# EAGLE board BigEasyDriver-Panel-v14 (EAGLE 6.4), part 1 of 2
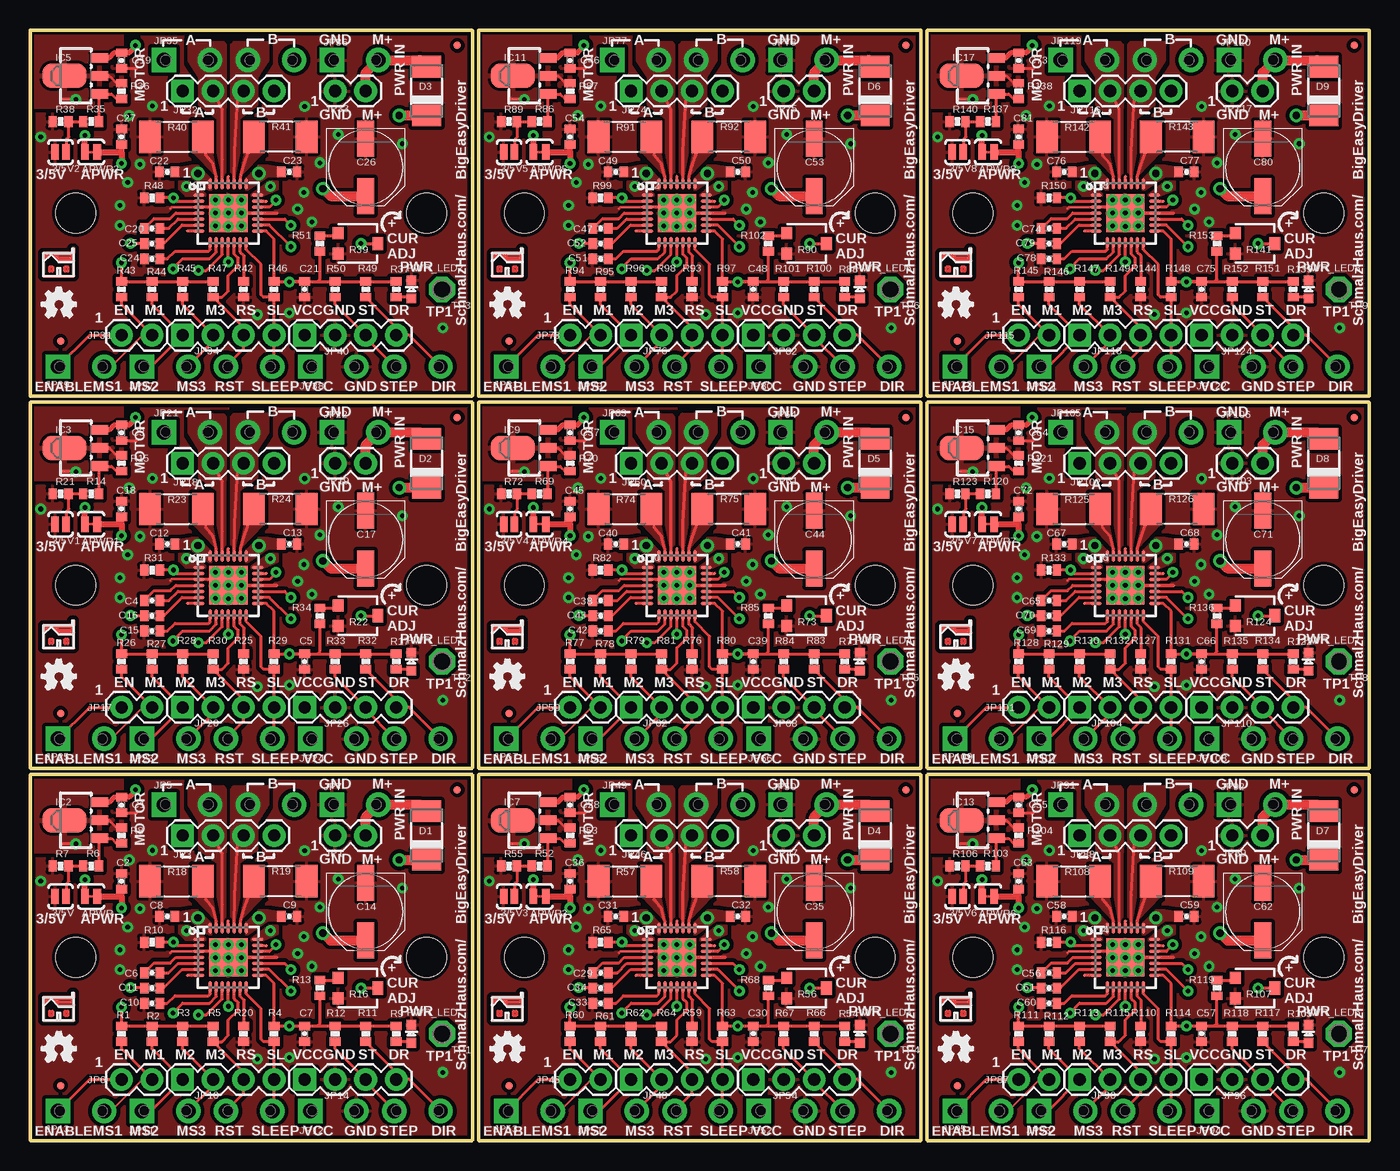
[diagram p0: board, top side]
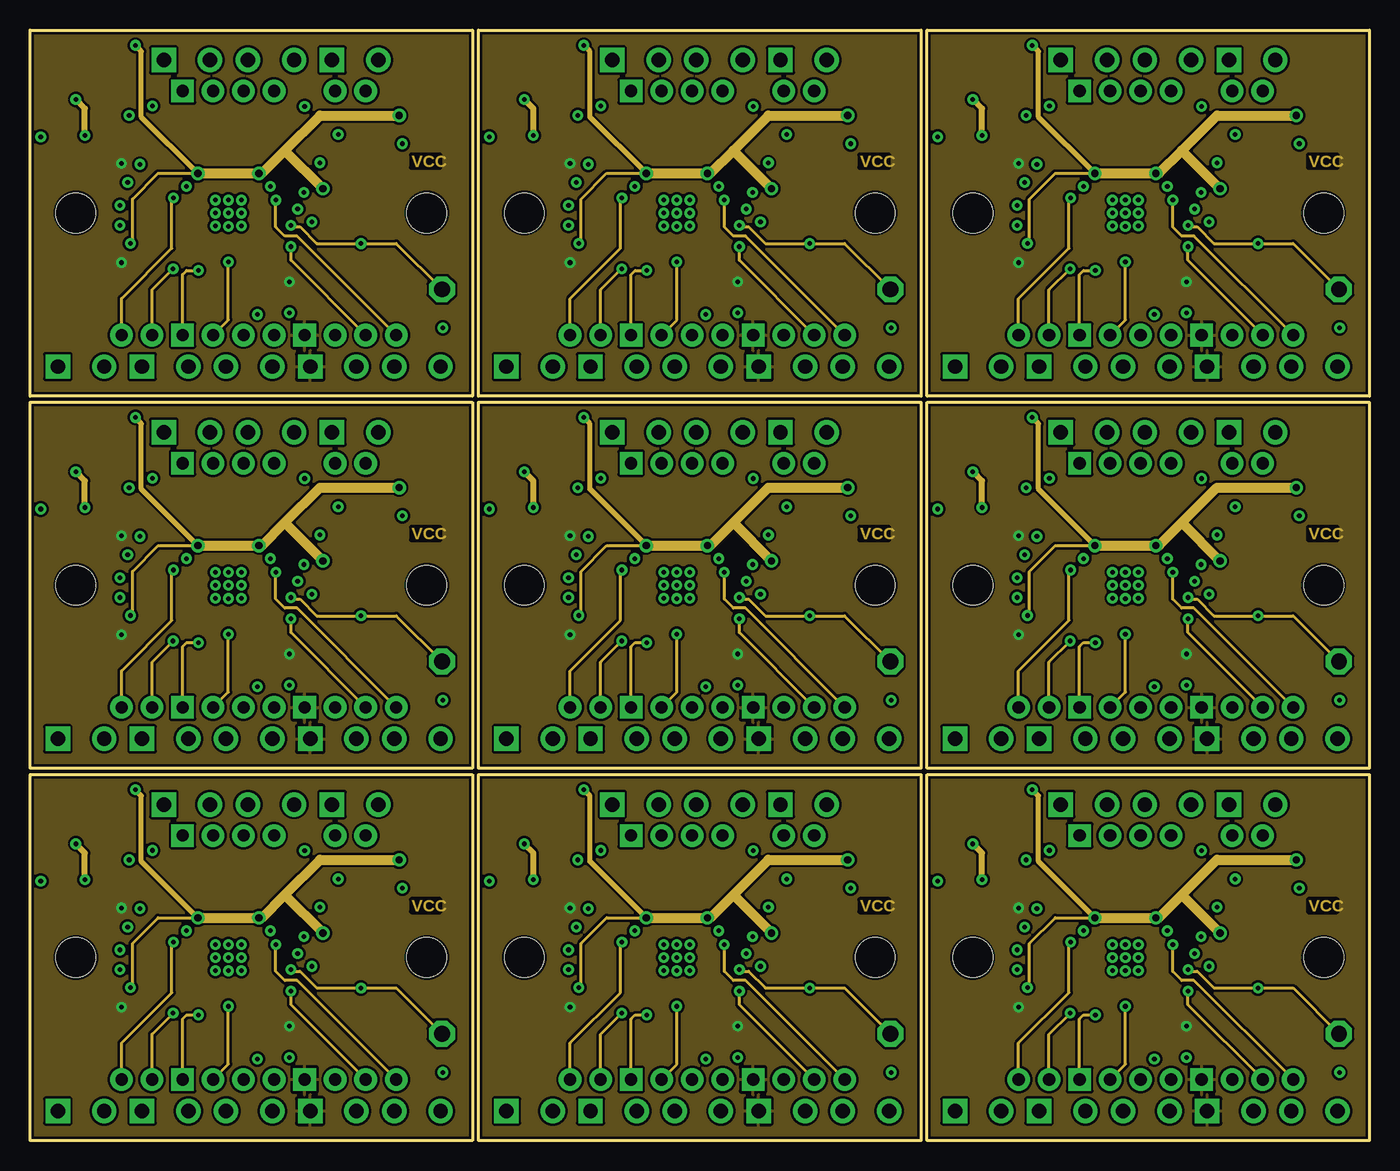
[diagram p1: board, inner layer VCC]
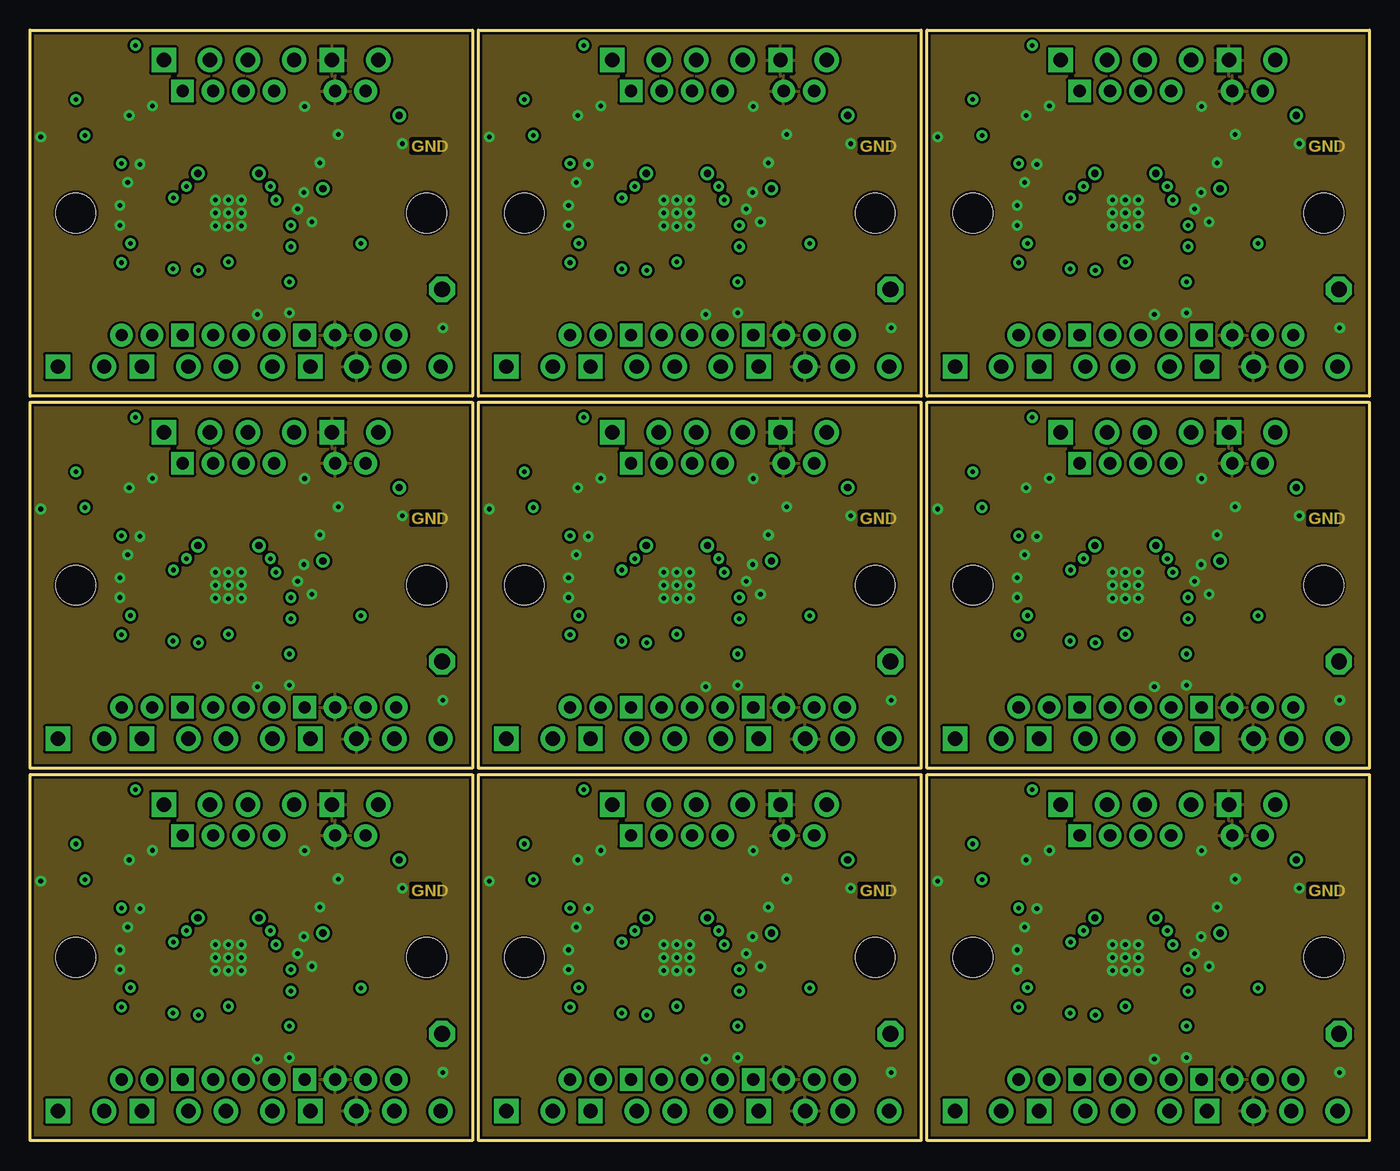
[diagram p2: board, inner layer GND]
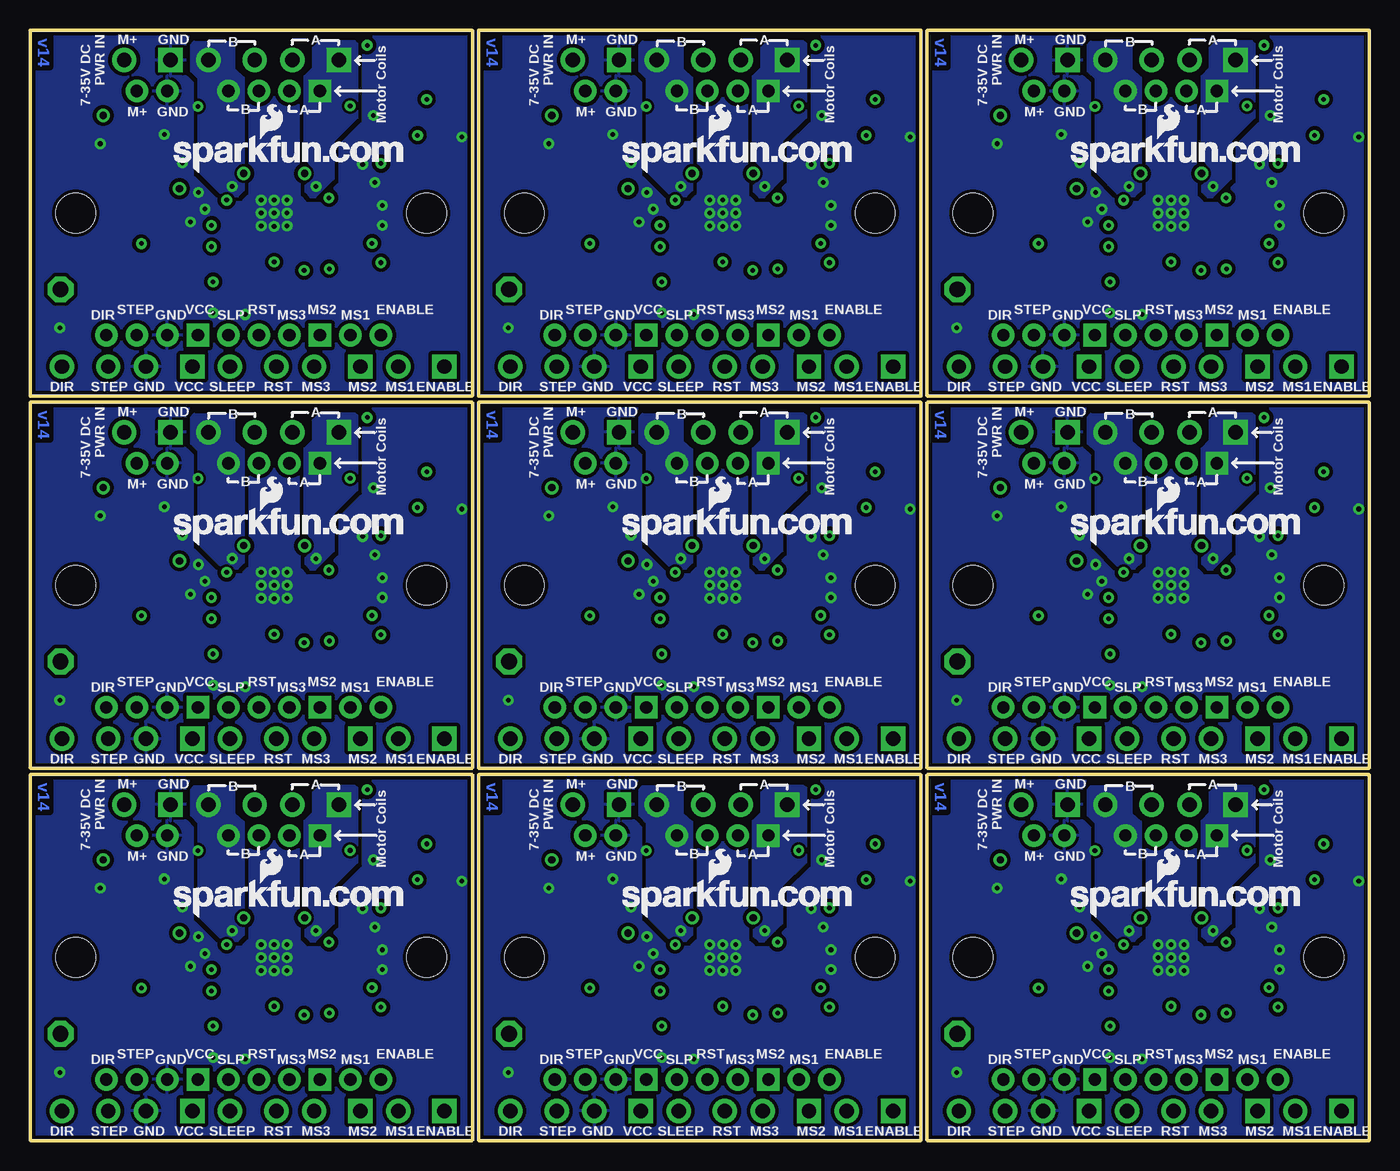
[diagram p3: board, bottom side, seen from below]

Size 111.51 x 92.46 mm. Coordinates in mm from the lower left corner, seen from the top.
Outline: 0,30.48 36.83,30.48 36.83,0 0,0 0,30.48
Outline: 0,61.47 36.83,61.47 36.83,30.99 0,30.99 0,61.47
Outline: 0,92.46 36.83,92.46 36.83,61.98 0,61.98 0,92.46
Outline: 37.34,30.48 74.17,30.48 74.17,0 37.34,0 37.34,30.48
Outline: 37.34,61.47 74.17,61.47 74.17,30.99 37.34,30.99 37.34,61.47
Outline: 37.34,92.46 74.17,92.46 74.17,61.98 37.34,61.98 37.34,92.46
Outline: 74.68,30.48 111.51,30.48 111.51,0 74.68,0 74.68,30.48
Outline: 74.68,61.47 111.51,61.47 111.51,30.99 74.68,30.99 74.68,61.47
Outline: 74.68,92.46 111.51,92.46 111.51,61.98 74.68,61.98 74.68,92.46
Copper layers (1*16): Top 0.035mm / dielectric 1.5mm / Bottom 0.035mm
Design rules "default": minimum track width 8mil, minimum drill 20mil, track to track 8mil, track to pad 8mil, pad to pad 8mil, via to via 8mil, smd to smd 8mil, copper to edge 8mil, drill to drill 8mil, minimum pad ring 12mil, minimum via ring 10mil, stop-mask expansion 4mil, vias tented up to drill 20mil, thermal gap 10mil

## Footprints (pad centres in the part's own frame; a part is rotated, then mirrored left to right if it is on the bottom)
SJ_2S-NO = smd 0.635 x 1.27: 1 -0.45,0; 2 0.45,0
SJ_2S-TRACE = smd 0.635 x 1.27: 1 -0.508,0; 2 0.508,0
0402-CAP = smd 0.7 x 0.9: 1 -0.65,0; 2 0.65,0
PANASONIC_D = smd 3 x 1.4: + 2.4,0; - -2.4,0
DO-214AC = smd 1.8 x 2.4: A 2.025,0; C -2.025,0
QFN-28-5MM_ALT1 = smd 0.94 x 0.3: P$1 -2.44,1.5; P$2 -2.44,1; P$3 -2.44,0.5; P$4 -2.44,0; P$5 -2.44,-0.5; P$6 -2.44,-1; P$7 -2.44,-1.5; P$15 2.44,-1.5; P$16 2.44,-1; P$17 2.44,-0.5; P$18 2.44,0; P$19 2.44,0.5; P$20 2.44,1; P$21 2.44,1.5 | smd 0.3 x 0.94: P$8 -1.5,-2.44; P$9 -1,-2.44; P$10 -0.5,-2.44; P$11 0,-2.44; P$12 0.5,-2.44; P$13 1,-2.44; P$14 1.5,-2.44; P$22 1.5,2.44; P$23 1,2.44; P$24 0.5,2.44; P$25 0,2.44; P$26 -0.5,2.44; P$27 -1,2.44; P$28 -1.5,2.44 | smd 3.175 x 3.175: P$29 0,0
SCHMALZHAUS_SOT89 = smd 0.8 x 1.4: ADJ -1.499,-1.981; IN 1.499,-1.981; OUT 0,-1.98 | smd 2.032 x 3.65: OUT@1 0,0.94
1X02 = drill 1.016 pad 1.88: 1 0,0; 2 2.54,0
FIDUCIAL-1X2.5 = smd 0.635 x 0.635: 1 0,0
1X04 = drill 1.016 pad 1.88 square: 1 0,0 | drill 1.016 pad 1.88: 2 2.54,0; 3 5.08,0; 4 7.62,0
SCREWTERMINAL-3.5MM-4_LOCK = drill 1.2 pad 2.032 square: 1 -0.178,0 | drill 1.2 pad 2.032: 2 3.678,0; 3 6.822,0; 4 10.678,0
SCREWTERMINAL-3.5MM-2_LOCK = drill 1.2 pad 2.032 square: 1 -0.178,0 | drill 1.2 pad 2.032: 2 3.678,0
STAND-OFF = hole 3.302: 0,0
LED-0603 = smd 0.8 x 0.8: A 0,-0.75; C 0,0.75
0402-RES = smd 0.7 x 0.9: 1 -0.65,0; 2 0.65,0
TRIMPOT-3MM = smd 1 x 0.9: 1 -0.85,-1.65; 3 0.85,-1.65 | smd 1.1 x 0.9: 2 0,1.65
R2010 = smd 1.8 x 2.7: 1 -2.2,0; 2 2.2,0
P1-13 = drill 1.321 pad 2.159 octagon: TP 0,0
PAD-0.008 = smd 0.203 x 0.203: P$1 0,0

## Placement (x,y rotation side)
3/5V  SOLDERJUMPERNO  [SJ_2S-NO]  2.54,20.32 180 top
3/5V1  SOLDERJUMPERNO  [SJ_2S-NO]  2.54,51.31 180 top
3/5V2  SOLDERJUMPERNO  [SJ_2S-NO]  2.54,82.3 180 top
3/5V3  SOLDERJUMPERNO  [SJ_2S-NO]  39.88,20.32 180 top
3/5V4  SOLDERJUMPERNO  [SJ_2S-NO]  39.88,51.31 180 top
3/5V5  SOLDERJUMPERNO  [SJ_2S-NO]  39.88,82.3 180 top
3/5V6  SOLDERJUMPERNO  [SJ_2S-NO]  77.22,20.32 180 top
3/5V7  SOLDERJUMPERNO  [SJ_2S-NO]  77.22,51.31 180 top
3/5V8  SOLDERJUMPERNO  [SJ_2S-NO]  77.22,82.3 180 top
APWR  SOLDERJUMPERTRACE  [SJ_2S-TRACE]  5.08,20.32 0 top
APWR1  SOLDERJUMPERTRACE  [SJ_2S-TRACE]  5.08,51.31 0 top
APWR2  SOLDERJUMPERTRACE  [SJ_2S-TRACE]  5.08,82.3 0 top
APWR3  SOLDERJUMPERTRACE  [SJ_2S-TRACE]  42.42,20.32 0 top
APWR4  SOLDERJUMPERTRACE  [SJ_2S-TRACE]  42.42,51.31 0 top
APWR5  SOLDERJUMPERTRACE  [SJ_2S-TRACE]  42.42,82.3 0 top
APWR6  SOLDERJUMPERTRACE  [SJ_2S-TRACE]  79.76,20.32 0 top
APWR7  SOLDERJUMPERTRACE  [SJ_2S-TRACE]  79.76,51.31 0 top
APWR8  SOLDERJUMPERTRACE  [SJ_2S-TRACE]  79.76,82.3 0 top
C1  .1uF  [0402-CAP]  7.62,27.94 270 top
C2  1uF  [0402-CAP]  7.62,21.59 90 top
C3  .1uF  [0402-CAP]  7.62,58.93 270 top
C4  .1uf  [0402-CAP]  10.16,44.96 0 top
C5  .1uf  [0402-CAP]  22.86,39.88 270 top
C6  .1uf  [0402-CAP]  10.16,13.97 0 top
C7  .1uf  [0402-CAP]  22.86,8.89 270 top
C8  .1uf  [0402-CAP]  11.43,18.67 180 top
C9  .1uf  [0402-CAP]  21.59,18.67 0 top
C10  .22uF  [0402-CAP]  10.16,11.43 180 top
C11  .1uf  [0402-CAP]  10.16,12.7 180 top
C12  .1uf  [0402-CAP]  11.43,49.66 180 top
C13  .1uf  [0402-CAP]  21.59,49.66 0 top
C14  47uF  [PANASONIC_D]  27.94,19.05 270 top
C15  .22uF  [0402-CAP]  10.16,42.42 180 top
C16  .1uf  [0402-CAP]  10.16,43.69 180 top
C17  47uF  [PANASONIC_D]  27.94,50.04 270 top
C18  1uF  [0402-CAP]  7.62,52.58 90 top
C19  .1uF  [0402-CAP]  7.62,89.92 270 top
C20  .1uf  [0402-CAP]  10.16,75.95 0 top
C21  .1uf  [0402-CAP]  22.86,70.87 270 top
C22  .1uf  [0402-CAP]  11.43,80.64 180 top
C23  .1uf  [0402-CAP]  21.59,80.64 0 top
C24  .22uF  [0402-CAP]  10.16,73.41 180 top
C25  .1uf  [0402-CAP]  10.16,74.68 180 top
C26  47uF  [PANASONIC_D]  27.94,81.03 270 top
C27  1uF  [0402-CAP]  7.62,83.57 90 top
C28  .1uF  [0402-CAP]  44.96,27.94 270 top
C29  .1uf  [0402-CAP]  47.5,13.97 0 top
C30  .1uf  [0402-CAP]  60.2,8.89 270 top
C31  .1uf  [0402-CAP]  48.77,18.67 180 top
C32  .1uf  [0402-CAP]  58.93,18.67 0 top
C33  .22uF  [0402-CAP]  47.5,11.43 180 top
C34  .1uf  [0402-CAP]  47.5,12.7 180 top
C35  47uF  [PANASONIC_D]  65.28,19.05 270 top
C36  1uF  [0402-CAP]  44.96,21.59 90 top
C37  .1uF  [0402-CAP]  44.96,58.93 270 top
C38  .1uf  [0402-CAP]  47.5,44.96 0 top
C39  .1uf  [0402-CAP]  60.2,39.88 270 top
C40  .1uf  [0402-CAP]  48.77,49.66 180 top
C41  .1uf  [0402-CAP]  58.93,49.66 0 top
C42  .22uF  [0402-CAP]  47.5,42.42 180 top
C43  .1uf  [0402-CAP]  47.5,43.69 180 top
C44  47uF  [PANASONIC_D]  65.28,50.04 270 top
C45  1uF  [0402-CAP]  44.96,52.58 90 top
C46  .1uF  [0402-CAP]  44.96,89.92 270 top
C47  .1uf  [0402-CAP]  47.5,75.95 0 top
C48  .1uf  [0402-CAP]  60.2,70.87 270 top
C49  .1uf  [0402-CAP]  48.77,80.64 180 top
C50  .1uf  [0402-CAP]  58.93,80.64 0 top
C51  .22uF  [0402-CAP]  47.5,73.41 180 top
C52  .1uf  [0402-CAP]  47.5,74.68 180 top
C53  47uF  [PANASONIC_D]  65.28,81.03 270 top
C54  1uF  [0402-CAP]  44.96,83.57 90 top
C55  .1uF  [0402-CAP]  82.3,27.94 270 top
C56  .1uf  [0402-CAP]  84.84,13.97 0 top
C57  .1uf  [0402-CAP]  97.54,8.89 270 top
C58  .1uf  [0402-CAP]  86.11,18.67 180 top
C59  .1uf  [0402-CAP]  96.27,18.67 0 top
C60  .22uF  [0402-CAP]  84.84,11.43 180 top
C61  .1uf  [0402-CAP]  84.84,12.7 180 top
C62  47uF  [PANASONIC_D]  102.62,19.05 270 top
C63  1uF  [0402-CAP]  82.3,21.59 90 top
C64  .1uF  [0402-CAP]  82.3,58.93 270 top
C65  .1uf  [0402-CAP]  84.84,44.96 0 top
C66  .1uf  [0402-CAP]  97.54,39.88 270 top
C67  .1uf  [0402-CAP]  86.11,49.66 180 top
C68  .1uf  [0402-CAP]  96.27,49.66 0 top
C69  .22uF  [0402-CAP]  84.84,42.42 180 top
C70  .1uf  [0402-CAP]  84.84,43.69 180 top
C71  47uF  [PANASONIC_D]  102.62,50.04 270 top
C72  1uF  [0402-CAP]  82.3,52.58 90 top
C73  .1uF  [0402-CAP]  82.3,89.92 270 top
C74  .1uf  [0402-CAP]  84.84,75.95 0 top
C75  .1uf  [0402-CAP]  97.54,70.87 270 top
C76  .1uf  [0402-CAP]  86.11,80.64 180 top
C77  .1uf  [0402-CAP]  96.27,80.64 0 top
C78  .22uF  [0402-CAP]  84.84,73.41 180 top
C79  .1uf  [0402-CAP]  84.84,74.68 180 top
C80  47uF  [PANASONIC_D]  102.62,81.03 270 top
C81  1uF  [0402-CAP]  82.3,83.57 90 top
D1  B340A-13-F  [DO-214AC]  33.02,25.4 90 top
D2  B340A-13-F  [DO-214AC]  33.02,56.39 90 top
D3  B340A-13-F  [DO-214AC]  33.02,87.38 90 top
D4  B340A-13-F  [DO-214AC]  70.36,25.4 90 top
D5  B340A-13-F  [DO-214AC]  70.36,56.39 90 top
D6  B340A-13-F  [DO-214AC]  70.36,87.38 90 top
D7  B340A-13-F  [DO-214AC]  107.7,25.4 90 top
D8  B340A-13-F  [DO-214AC]  107.7,56.39 90 top
D9  B340A-13-F  [DO-214AC]  107.7,87.38 90 top
IC1  A4983ALT1  [QFN-28-5MM_ALT1]  16.51,15.24 0 top
IC2  LM317L  [SCHMALZHAUS_SOT89]  3.81,26.67 90 top
IC3  LM317L  [SCHMALZHAUS_SOT89]  3.81,57.66 90 top
IC4  A4983ALT1  [QFN-28-5MM_ALT1]  16.51,46.23 0 top
IC5  LM317L  [SCHMALZHAUS_SOT89]  3.81,88.65 90 top
IC6  A4983ALT1  [QFN-28-5MM_ALT1]  16.51,77.22 0 top
IC7  LM317L  [SCHMALZHAUS_SOT89]  41.15,26.67 90 top
IC8  A4983ALT1  [QFN-28-5MM_ALT1]  53.85,15.24 0 top
IC9  LM317L  [SCHMALZHAUS_SOT89]  41.15,57.66 90 top
IC10  A4983ALT1  [QFN-28-5MM_ALT1]  53.85,46.23 0 top
IC11  LM317L  [SCHMALZHAUS_SOT89]  41.15,88.65 90 top
IC12  A4983ALT1  [QFN-28-5MM_ALT1]  53.85,77.22 0 top
IC13  LM317L  [SCHMALZHAUS_SOT89]  78.49,26.67 90 top
IC14  A4983ALT1  [QFN-28-5MM_ALT1]  91.19,15.24 0 top
IC15  LM317L  [SCHMALZHAUS_SOT89]  78.49,57.66 90 top
IC16  A4983ALT1  [QFN-28-5MM_ALT1]  91.19,46.23 0 top
IC17  LM317L  [SCHMALZHAUS_SOT89]  78.49,88.65 90 top
IC18  A4983ALT1  [QFN-28-5MM_ALT1]  91.19,77.22 0 top
JP1  [1X02]  25.4,25.4 0 top
JP2  FIDUCIAL1X2.5  [FIDUCIAL-1X2.5]  35.56,29.21 0 top
JP3  [1X04]  12.7,25.4 0 top
JP4  FIDUCIAL1X2.5  [FIDUCIAL-1X2.5]  2.54,4.57 0 top
JP5  [SCREWTERMINAL-3.5MM-4_LOCK]  11.31,27.98 0 top
JP6  [1X02]  7.62,5.08 0 top
JP7  [SCREWTERMINAL-3.5MM-2_LOCK]  25.31,27.98 0 top
JP8  STAND-OFF  [STAND-OFF]  3.81,15.24 0 top
JP9  STAND-OFF  [STAND-OFF]  33.02,15.24 0 top
JP10  [1X04]  12.7,5.08 0 top
JP11  [SCREWTERMINAL-3.5MM-4_LOCK]  9.5,2.46 0 top
JP12  [SCREWTERMINAL-3.5MM-4_LOCK]  23.5,2.46 0 top
JP13  [SCREWTERMINAL-3.5MM-2_LOCK]  2.5,2.46 0 top
JP14  [1X04]  22.86,5.08 0 top
JP15  STAND-OFF  [STAND-OFF]  3.81,46.23 0 top
JP16  STAND-OFF  [STAND-OFF]  33.02,46.23 0 top
JP17  [1X02]  7.62,36.07 0 top
JP18  [1X04]  12.7,56.39 0 top
JP19  [1X02]  25.4,56.39 0 top
JP20  [1X04]  12.7,36.07 0 top
JP21  [SCREWTERMINAL-3.5MM-4_LOCK]  11.31,58.97 0 top
JP22  [SCREWTERMINAL-3.5MM-2_LOCK]  25.31,58.97 0 top
JP23  [SCREWTERMINAL-3.5MM-4_LOCK]  9.5,33.45 0 top
JP24  [SCREWTERMINAL-3.5MM-4_LOCK]  23.5,33.45 0 top
JP25  [SCREWTERMINAL-3.5MM-2_LOCK]  2.5,33.45 0 top
JP26  [1X04]  22.86,36.07 0 top
JP27  FIDUCIAL1X2.5  [FIDUCIAL-1X2.5]  35.56,60.2 0 top
JP28  FIDUCIAL1X2.5  [FIDUCIAL-1X2.5]  2.54,35.56 0 top
JP29  STAND-OFF  [STAND-OFF]  3.81,77.22 0 top
JP30  STAND-OFF  [STAND-OFF]  33.02,77.22 0 top
JP31  [1X02]  7.62,67.06 0 top
JP32  [1X04]  12.7,87.38 0 top
JP33  [1X02]  25.4,87.38 0 top
JP34  [1X04]  12.7,67.06 0 top
JP35  [SCREWTERMINAL-3.5MM-4_LOCK]  11.31,89.96 0 top
JP36  [SCREWTERMINAL-3.5MM-2_LOCK]  25.31,89.96 0 top
JP37  [SCREWTERMINAL-3.5MM-4_LOCK]  9.5,64.44 0 top
JP38  [SCREWTERMINAL-3.5MM-4_LOCK]  23.5,64.44 0 top
JP39  [SCREWTERMINAL-3.5MM-2_LOCK]  2.5,64.44 0 top
JP40  [1X04]  22.86,67.06 0 top
JP41  FIDUCIAL1X2.5  [FIDUCIAL-1X2.5]  35.56,91.19 0 top
JP42  FIDUCIAL1X2.5  [FIDUCIAL-1X2.5]  2.54,66.55 0 top
JP43  STAND-OFF  [STAND-OFF]  41.15,15.24 0 top
JP44  STAND-OFF  [STAND-OFF]  70.36,15.24 0 top
JP45  [1X02]  44.96,5.08 0 top
JP46  [1X04]  50.04,25.4 0 top
JP47  [1X02]  62.74,25.4 0 top
JP48  [1X04]  50.04,5.08 0 top
JP49  [SCREWTERMINAL-3.5MM-4_LOCK]  48.65,27.98 0 top
JP50  [SCREWTERMINAL-3.5MM-2_LOCK]  62.65,27.98 0 top
JP51  [SCREWTERMINAL-3.5MM-4_LOCK]  46.84,2.46 0 top
JP52  [SCREWTERMINAL-3.5MM-4_LOCK]  60.84,2.46 0 top
JP53  [SCREWTERMINAL-3.5MM-2_LOCK]  39.84,2.46 0 top
JP54  [1X04]  60.2,5.08 0 top
JP55  FIDUCIAL1X2.5  [FIDUCIAL-1X2.5]  72.9,29.21 0 top
JP56  FIDUCIAL1X2.5  [FIDUCIAL-1X2.5]  39.88,4.57 0 top
JP57  STAND-OFF  [STAND-OFF]  41.15,46.23 0 top
JP58  STAND-OFF  [STAND-OFF]  70.36,46.23 0 top
JP59  [1X02]  44.96,36.07 0 top
JP60  [1X04]  50.04,56.39 0 top
JP61  [1X02]  62.74,56.39 0 top
JP62  [1X04]  50.04,36.07 0 top
JP63  [SCREWTERMINAL-3.5MM-4_LOCK]  48.65,58.97 0 top
JP64  [SCREWTERMINAL-3.5MM-2_LOCK]  62.65,58.97 0 top
JP65  [SCREWTERMINAL-3.5MM-4_LOCK]  46.84,33.45 0 top
JP66  [SCREWTERMINAL-3.5MM-4_LOCK]  60.84,33.45 0 top
JP67  [SCREWTERMINAL-3.5MM-2_LOCK]  39.84,33.45 0 top
JP68  [1X04]  60.2,36.07 0 top
JP69  FIDUCIAL1X2.5  [FIDUCIAL-1X2.5]  72.9,60.2 0 top
JP70  FIDUCIAL1X2.5  [FIDUCIAL-1X2.5]  39.88,35.56 0 top
JP71  STAND-OFF  [STAND-OFF]  41.15,77.22 0 top
JP72  STAND-OFF  [STAND-OFF]  70.36,77.22 0 top
JP73  [1X02]  44.96,67.06 0 top
JP74  [1X04]  50.04,87.38 0 top
JP75  [1X02]  62.74,87.38 0 top
JP76  [1X04]  50.04,67.06 0 top
JP77  [SCREWTERMINAL-3.5MM-4_LOCK]  48.65,89.96 0 top
JP78  [SCREWTERMINAL-3.5MM-2_LOCK]  62.65,89.96 0 top
JP79  [SCREWTERMINAL-3.5MM-4_LOCK]  46.84,64.44 0 top
JP80  [SCREWTERMINAL-3.5MM-4_LOCK]  60.84,64.44 0 top
JP81  [SCREWTERMINAL-3.5MM-2_LOCK]  39.84,64.44 0 top
JP82  [1X04]  60.2,67.06 0 top
JP83  FIDUCIAL1X2.5  [FIDUCIAL-1X2.5]  72.9,91.19 0 top
JP84  FIDUCIAL1X2.5  [FIDUCIAL-1X2.5]  39.88,66.55 0 top
JP85  STAND-OFF  [STAND-OFF]  78.49,15.24 0 top
JP86  STAND-OFF  [STAND-OFF]  107.7,15.24 0 top
JP87  [1X02]  82.3,5.08 0 top
JP88  [1X04]  87.38,25.4 0 top
JP89  [1X02]  100.08,25.4 0 top
JP90  [1X04]  87.38,5.08 0 top
JP91  [SCREWTERMINAL-3.5MM-4_LOCK]  85.99,27.98 0 top
JP92  [SCREWTERMINAL-3.5MM-2_LOCK]  99.99,27.98 0 top
JP93  [SCREWTERMINAL-3.5MM-4_LOCK]  84.18,2.46 0 top
JP94  [SCREWTERMINAL-3.5MM-4_LOCK]  98.18,2.46 0 top
JP95  [SCREWTERMINAL-3.5MM-2_LOCK]  77.18,2.46 0 top
JP96  [1X04]  97.54,5.08 0 top
JP97  FIDUCIAL1X2.5  [FIDUCIAL-1X2.5]  110.24,29.21 0 top
JP98  FIDUCIAL1X2.5  [FIDUCIAL-1X2.5]  77.22,4.57 0 top
JP99  STAND-OFF  [STAND-OFF]  78.49,46.23 0 top
JP100  STAND-OFF  [STAND-OFF]  107.7,46.23 0 top
JP101  [1X02]  82.3,36.07 0 top
JP102  [1X04]  87.38,56.39 0 top
JP103  [1X02]  100.08,56.39 0 top
JP104  [1X04]  87.38,36.07 0 top
JP105  [SCREWTERMINAL-3.5MM-4_LOCK]  85.99,58.97 0 top
JP106  [SCREWTERMINAL-3.5MM-2_LOCK]  99.99,58.97 0 top
JP107  [SCREWTERMINAL-3.5MM-4_LOCK]  84.18,33.45 0 top
JP108  [SCREWTERMINAL-3.5MM-4_LOCK]  98.18,33.45 0 top
JP109  [SCREWTERMINAL-3.5MM-2_LOCK]  77.18,33.45 0 top
JP110  [1X04]  97.54,36.07 0 top
JP111  FIDUCIAL1X2.5  [FIDUCIAL-1X2.5]  110.24,60.2 0 top
JP112  FIDUCIAL1X2.5  [FIDUCIAL-1X2.5]  77.22,35.56 0 top
JP113  STAND-OFF  [STAND-OFF]  78.49,77.22 0 top
JP114  STAND-OFF  [STAND-OFF]  107.7,77.22 0 top
JP115  [1X02]  82.3,67.06 0 top
JP116  [1X04]  87.38,87.38 0 top
JP117  [1X02]  100.08,87.38 0 top
JP118  [1X04]  87.38,67.06 0 top
JP119  [SCREWTERMINAL-3.5MM-4_LOCK]  85.99,89.96 0 top
JP120  [SCREWTERMINAL-3.5MM-2_LOCK]  99.99,89.96 0 top
JP121  [SCREWTERMINAL-3.5MM-4_LOCK]  84.18,64.44 0 top
JP122  [SCREWTERMINAL-3.5MM-4_LOCK]  98.18,64.44 0 top
JP123  [SCREWTERMINAL-3.5MM-2_LOCK]  77.18,64.44 0 top
JP124  [1X04]  97.54,67.06 0 top
JP125  FIDUCIAL1X2.5  [FIDUCIAL-1X2.5]  110.24,91.19 0 top
JP126  FIDUCIAL1X2.5  [FIDUCIAL-1X2.5]  77.22,66.55 0 top
LOGO1  OSHW_LOGO_FILLX0100-NT  [OSHW_FILLX100_NOTEXT]  0.99,6.53 0 top
LOGO2  OSHW_LOGO_FILLX0100-NT  [OSHW_FILLX100_NOTEXT]  0.99,37.52 0 top
LOGO3  OSHW_LOGO_FILLX0100-NT  [OSHW_FILLX100_NOTEXT]  0.99,68.5 0 top
LOGO4  OSHW_LOGO_FILLX0100-NT  [OSHW_FILLX100_NOTEXT]  38.33,6.53 0 top
LOGO5  OSHW_LOGO_FILLX0100-NT  [OSHW_FILLX100_NOTEXT]  38.33,37.52 0 top
LOGO6  OSHW_LOGO_FILLX0100-NT  [OSHW_FILLX100_NOTEXT]  38.33,68.5 0 top
LOGO7  OSHW_LOGO_FILLX0100-NT  [OSHW_FILLX100_NOTEXT]  75.67,6.53 0 top
LOGO8  OSHW_LOGO_FILLX0100-NT  [OSHW_FILLX100_NOTEXT]  75.67,37.52 0 top
LOGO9  OSHW_LOGO_FILLX0100-NT  [OSHW_FILLX100_NOTEXT]  75.67,68.5 0 top
PWR_LED  YELLOW  [LED-0603]  31.75,8.89 0 top
PWR_LED1  YELLOW  [LED-0603]  31.75,39.88 0 top
PWR_LED2  YELLOW  [LED-0603]  31.75,70.87 0 top
PWR_LED3  YELLOW  [LED-0603]  69.09,8.89 0 top
PWR_LED4  YELLOW  [LED-0603]  69.09,39.88 0 top
PWR_LED5  YELLOW  [LED-0603]  69.09,70.87 0 top
PWR_LED6  YELLOW  [LED-0603]  106.43,8.89 0 top
PWR_LED7  YELLOW  [LED-0603]  106.43,39.88 0 top
PWR_LED8  YELLOW  [LED-0603]  106.43,70.87 0 top
R1  20K  [0402-RES]  7.62,8.89 90 top
R2  20K  [0402-RES]  10.16,8.89 90 top
R3  20K  [0402-RES]  12.7,8.89 90 top
R4  20K  [0402-RES]  20.32,8.89 90 top
R5  20K  [0402-RES]  15.24,8.89 90 top
R6  390  [0402-RES]  5.08,22.86 0 top
R7  330  [0402-RES]  2.54,22.86 0 top
R8  240  [0402-RES]  7.62,25.4 90 top
R9  1K  [0402-RES]  30.48,8.89 90 top
R10  20K  [0402-RES]  10.16,16.51 180 top
R11  20K  [0402-RES]  27.94,8.89 90 top
R12  20K  [0402-RES]  25.4,8.89 90 top
R13  2.49K  [0402-RES]  24.13,12.7 90 top
R14  390  [0402-RES]  5.08,53.85 0 top
R15  240  [0402-RES]  7.62,56.39 90 top
R16  10K  [TRIMPOT-3MM]  27.3,12.7 270 top
R17  1K  [0402-RES]  30.48,39.88 90 top
R18  .11  [R2010]  12.19,21.59 0 top
R19  .11  [R2010]  20.83,21.59 180 top
R20  20K  [0402-RES]  17.78,8.89 270 top
R21  330  [0402-RES]  2.54,53.85 0 top
R22  10K  [TRIMPOT-3MM]  27.3,43.69 270 top
R23  .11  [R2010]  12.19,52.58 0 top
R24  .11  [R2010]  20.83,52.58 180 top
R25  20K  [0402-RES]  17.78,39.88 270 top
R26  20K  [0402-RES]  7.62,39.88 90 top
R27  20K  [0402-RES]  10.16,39.88 90 top
R28  20K  [0402-RES]  12.7,39.88 90 top
R29  20K  [0402-RES]  20.32,39.88 90 top
R30  20K  [0402-RES]  15.24,39.88 90 top
R31  20K  [0402-RES]  10.16,47.5 180 top
R32  20K  [0402-RES]  27.94,39.88 90 top
R33  20K  [0402-RES]  25.4,39.88 90 top
R34  2.49K  [0402-RES]  24.13,43.69 90 top
R35  390  [0402-RES]  5.08,84.84 0 top
R36  240  [0402-RES]  7.62,87.38 90 top
R37  1K  [0402-RES]  30.48,70.87 90 top
R38  330  [0402-RES]  2.54,84.84 0 top
R39  10K  [TRIMPOT-3MM]  27.3,74.68 270 top
R40  .11  [R2010]  12.19,83.57 0 top
R41  .11  [R2010]  20.83,83.57 180 top
R42  20K  [0402-RES]  17.78,70.87 270 top
R43  20K  [0402-RES]  7.62,70.87 90 top
R44  20K  [0402-RES]  10.16,70.87 90 top
R45  20K  [0402-RES]  12.7,70.87 90 top
R46  20K  [0402-RES]  20.32,70.87 90 top
R47  20K  [0402-RES]  15.24,70.87 90 top
R48  20K  [0402-RES]  10.16,78.49 180 top
R49  20K  [0402-RES]  27.94,70.87 90 top
R50  20K  [0402-RES]  25.4,70.87 90 top
R51  2.49K  [0402-RES]  24.13,74.68 90 top
R52  390  [0402-RES]  42.42,22.86 0 top
R53  240  [0402-RES]  44.96,25.4 90 top
R54  1K  [0402-RES]  67.82,8.89 90 top
R55  330  [0402-RES]  39.88,22.86 0 top
R56  10K  [TRIMPOT-3MM]  64.64,12.7 270 top
R57  .11  [R2010]  49.53,21.59 0 top
R58  .11  [R2010]  58.17,21.59 180 top
R59  20K  [0402-RES]  55.12,8.89 270 top
R60  20K  [0402-RES]  44.96,8.89 90 top
R61  20K  [0402-RES]  47.5,8.89 90 top
R62  20K  [0402-RES]  50.04,8.89 90 top
R63  20K  [0402-RES]  57.66,8.89 90 top
R64  20K  [0402-RES]  52.58,8.89 90 top
R65  20K  [0402-RES]  47.5,16.51 180 top
R66  20K  [0402-RES]  65.28,8.89 90 top
R67  20K  [0402-RES]  62.74,8.89 90 top
R68  2.49K  [0402-RES]  61.47,12.7 90 top
R69  390  [0402-RES]  42.42,53.85 0 top
R70  240  [0402-RES]  44.96,56.39 90 top
R71  1K  [0402-RES]  67.82,39.88 90 top
R72  330  [0402-RES]  39.88,53.85 0 top
R73  10K  [TRIMPOT-3MM]  64.64,43.69 270 top
R74  .11  [R2010]  49.53,52.58 0 top
R75  .11  [R2010]  58.17,52.58 180 top
R76  20K  [0402-RES]  55.12,39.88 270 top
R77  20K  [0402-RES]  44.96,39.88 90 top
R78  20K  [0402-RES]  47.5,39.88 90 top
R79  20K  [0402-RES]  50.04,39.88 90 top
R80  20K  [0402-RES]  57.66,39.88 90 top
R81  20K  [0402-RES]  52.58,39.88 90 top
R82  20K  [0402-RES]  47.5,47.5 180 top
R83  20K  [0402-RES]  65.28,39.88 90 top
R84  20K  [0402-RES]  62.74,39.88 90 top
R85  2.49K  [0402-RES]  61.47,43.69 90 top
R86  390  [0402-RES]  42.42,84.84 0 top
R87  240  [0402-RES]  44.96,87.38 90 top
R88  1K  [0402-RES]  67.82,70.87 90 top
R89  330  [0402-RES]  39.88,84.84 0 top
R90  10K  [TRIMPOT-3MM]  64.64,74.68 270 top
R91  .11  [R2010]  49.53,83.57 0 top
R92  .11  [R2010]  58.17,83.57 180 top
R93  20K  [0402-RES]  55.12,70.87 270 top
R94  20K  [0402-RES]  44.96,70.87 90 top
R95  20K  [0402-RES]  47.5,70.87 90 top
R96  20K  [0402-RES]  50.04,70.87 90 top
R97  20K  [0402-RES]  57.66,70.87 90 top
R98  20K  [0402-RES]  52.58,70.87 90 top
R99  20K  [0402-RES]  47.5,78.49 180 top
R100  20K  [0402-RES]  65.28,70.87 90 top
R101  20K  [0402-RES]  62.74,70.87 90 top
R102  2.49K  [0402-RES]  61.47,74.68 90 top
R103  390  [0402-RES]  79.76,22.86 0 top
R104  240  [0402-RES]  82.3,25.4 90 top
R105  1K  [0402-RES]  105.16,8.89 90 top
R106  330  [0402-RES]  77.22,22.86 0 top
R107  10K  [TRIMPOT-3MM]  101.98,12.7 270 top
R108  .11  [R2010]  86.87,21.59 0 top
R109  .11  [R2010]  95.5,21.59 180 top
R110  20K  [0402-RES]  92.46,8.89 270 top
R111  20K  [0402-RES]  82.3,8.89 90 top
R112  20K  [0402-RES]  84.84,8.89 90 top
R113  20K  [0402-RES]  87.38,8.89 90 top
R114  20K  [0402-RES]  95,8.89 90 top
R115  20K  [0402-RES]  89.92,8.89 90 top
R116  20K  [0402-RES]  84.84,16.51 180 top
R117  20K  [0402-RES]  102.62,8.89 90 top
R118  20K  [0402-RES]  100.08,8.89 90 top
R119  2.49K  [0402-RES]  98.81,12.7 90 top
R120  390  [0402-RES]  79.76,53.85 0 top
R121  240  [0402-RES]  82.3,56.39 90 top
R122  1K  [0402-RES]  105.16,39.88 90 top
R123  330  [0402-RES]  77.22,53.85 0 top
R124  10K  [TRIMPOT-3MM]  101.98,43.69 270 top
R125  .11  [R2010]  86.87,52.58 0 top
R126  .11  [R2010]  95.5,52.58 180 top
R127  20K  [0402-RES]  92.46,39.88 270 top
R128  20K  [0402-RES]  82.3,39.88 90 top
R129  20K  [0402-RES]  84.84,39.88 90 top
R130  20K  [0402-RES]  87.38,39.88 90 top
R131  20K  [0402-RES]  95,39.88 90 top
R132  20K  [0402-RES]  89.92,39.88 90 top
R133  20K  [0402-RES]  84.84,47.5 180 top
R134  20K  [0402-RES]  102.62,39.88 90 top
R135  20K  [0402-RES]  100.08,39.88 90 top
R136  2.49K  [0402-RES]  98.81,43.69 90 top
R137  390  [0402-RES]  79.76,84.84 0 top
R138  240  [0402-RES]  82.3,87.38 90 top
R139  1K  [0402-RES]  105.16,70.87 90 top
R140  330  [0402-RES]  77.22,84.84 0 top
R141  10K  [TRIMPOT-3MM]  101.98,74.68 270 top
R142  .11  [R2010]  86.87,83.57 0 top
R143  .11  [R2010]  95.5,83.57 180 top
R144  20K  [0402-RES]  92.46,70.87 270 top
R145  20K  [0402-RES]  82.3,70.87 90 top
R146  20K  [0402-RES]  84.84,70.87 90 top
R147  20K  [0402-RES]  87.38,70.87 90 top
R148  20K  [0402-RES]  95,70.87 90 top
R149  20K  [0402-RES]  89.92,70.87 90 top
R150  20K  [0402-RES]  84.84,78.49 180 top
R151  20K  [0402-RES]  102.62,70.87 90 top
R152  20K  [0402-RES]  100.08,70.87 90 top
R153  2.49K  [0402-RES]  98.81,74.68 90 top
TP1  TPPAD1-13  [P1-13]  34.29,8.89 0 top
TP2  TPPAD1-13  [P1-13]  34.29,39.88 0 top
TP3  TPPAD1-13  [P1-13]  34.29,70.87 0 top
TP4  TPPAD1-13  [P1-13]  71.63,8.89 0 top
TP5  TPPAD1-13  [P1-13]  71.63,39.88 0 top
TP6  TPPAD1-13  [P1-13]  71.63,70.87 0 top
TP7  TPPAD1-13  [P1-13]  108.97,8.89 0 top
TP8  TPPAD1-13  [P1-13]  108.97,39.88 0 top
TP9  TPPAD1-13  [P1-13]  108.97,70.87 0 top
U$1  [SCHMALZHAUS_SMALL]  2.39,10.01 0 top
U$2  LOGO-SFENEW  [SFE-NEW-WEBLOGO]  24.87,18.57 0 bottom
U$3  PAD  [PAD-0.008]  13.11,13.74 0 top
U$4  PAD  [PAD-0.008]  19.66,16.23 0 top
U$5  PAD  [PAD-0.008]  16.51,18.29 0 top
U$6  [SCHMALZHAUS_SMALL]  2.39,41 0 top
U$7  LOGO-SFENEW  [SFE-NEW-WEBLOGO]  24.87,49.56 0 bottom
U$8  PAD  [PAD-0.008]  13.11,44.73 0 top
U$9  PAD  [PAD-0.008]  19.66,47.22 0 top
U$10  PAD  [PAD-0.008]  16.51,49.28 0 top
U$11  [SCHMALZHAUS_SMALL]  2.39,71.98 0 top
U$12  LOGO-SFENEW  [SFE-NEW-WEBLOGO]  24.87,80.54 0 bottom
U$13  PAD  [PAD-0.008]  13.11,75.72 0 top
U$14  PAD  [PAD-0.008]  19.66,78.21 0 top
U$15  PAD  [PAD-0.008]  16.51,80.26 0 top
U$16  [SCHMALZHAUS_SMALL]  39.73,10.01 0 top
U$17  LOGO-SFENEW  [SFE-NEW-WEBLOGO]  62.2,18.57 0 bottom
U$18  PAD  [PAD-0.008]  50.44,13.74 0 top
U$19  PAD  [PAD-0.008]  57,16.23 0 top
U$20  PAD  [PAD-0.008]  53.85,18.29 0 top
U$21  [SCHMALZHAUS_SMALL]  39.73,41 0 top
U$22  LOGO-SFENEW  [SFE-NEW-WEBLOGO]  62.2,49.56 0 bottom
U$23  PAD  [PAD-0.008]  50.44,44.73 0 top
U$24  PAD  [PAD-0.008]  57,47.22 0 top
U$25  PAD  [PAD-0.008]  53.85,49.28 0 top
U$26  [SCHMALZHAUS_SMALL]  39.73,71.98 0 top
U$27  LOGO-SFENEW  [SFE-NEW-WEBLOGO]  62.2,80.54 0 bottom
U$28  PAD  [PAD-0.008]  50.44,75.72 0 top
U$29  PAD  [PAD-0.008]  57,78.21 0 top
U$30  PAD  [PAD-0.008]  53.85,80.26 0 top
U$31  [SCHMALZHAUS_SMALL]  77.06,10.01 0 top
U$32  LOGO-SFENEW  [SFE-NEW-WEBLOGO]  99.54,18.57 0 bottom
U$33  PAD  [PAD-0.008]  87.78,13.74 0 top
U$34  PAD  [PAD-0.008]  94.34,16.23 0 top
U$35  PAD  [PAD-0.008]  91.19,18.29 0 top
U$36  [SCHMALZHAUS_SMALL]  77.06,41 0 top
U$37  LOGO-SFENEW  [SFE-NEW-WEBLOGO]  99.54,49.56 0 bottom
U$38  PAD  [PAD-0.008]  87.78,44.73 0 top
U$39  PAD  [PAD-0.008]  94.34,47.22 0 top
U$40  PAD  [PAD-0.008]  91.19,49.28 0 top
U$41  [SCHMALZHAUS_SMALL]  77.06,71.98 0 top
U$42  LOGO-SFENEW  [SFE-NEW-WEBLOGO]  99.54,80.54 0 bottom
U$43  PAD  [PAD-0.008]  87.78,75.72 0 top
U$44  PAD  [PAD-0.008]  94.34,78.21 0 top
U$45  PAD  [PAD-0.008]  91.19,80.26 0 top

## Library data of the parts
3/5V 3/5V1-3/5V8 APWR APWR1-APWR8 PWR_LED PWR_LED1-PWR_LED8 = SparkFun03_30_09
C1-C81 JP1 JP3 JP6 JP10 JP14 JP17-JP20 JP26 JP31-JP34 JP40 JP45-JP48 JP54 JP59-JP62 JP68 JP73-JP76 JP82 JP87-JP90 JP96 JP101-JP104 JP110 JP115-JP118 JP124 R1-R153 U$2 U$7 U$12 U$17 U$22 U$27 U$32 U$37 U$42 = SparkFun
D1-D9 = diode
IC1 IC4 IC6 IC8 IC10 IC12 IC14 IC16 IC18 U$3-U$5 U$8-U$10 U$13-U$15 U$18-U$20 U$23-U$25 U$28-U$30 U$33-U$35 U$38-U$40 U$43-U$45 = Testing
IC2 IC3 IC5 IC7 IC9 IC11 IC13 IC15 IC17 JP5 JP7 JP11-JP13 JP21-JP25 JP35-JP39 JP49-JP53 JP63-JP67 JP77-JP81 JP91-JP95 JP105-JP109 JP119-JP123 = BigEasyDriver_v11
JP2 JP4 JP27 JP28 JP41 JP42 JP55 JP56 JP69 JP70 JP83 JP84 JP97 JP98 JP111 JP112 JP125 JP126 = abes
JP8 JP9 JP15 JP16 JP29 JP30 JP43 JP44 JP57 JP58 JP71 JP72 JP85 JP86 JP99 JP100 JP113 JP114 = SparkFun-7-28-09
LOGO1-LOGO9 = OSHW
TP1-TP9 = testpad
U$1 U$6 U$11 U$16 U$21 U$26 U$31 U$36 U$41 = SchmalzHaus

## Nets
5V_ALT: APWR.1 IC2.OUT IC2.OUT@1 R8.2
5V_ALT1: APWR1.1 IC3.OUT IC3.OUT@1 R15.2
5V_ALT2: APWR2.1 IC5.OUT IC5.OUT@1 R36.2
5V_ALT3: APWR3.1 IC7.OUT IC7.OUT@1 R53.2
5V_ALT4: APWR4.1 IC9.OUT IC9.OUT@1 R70.2
5V_ALT5: APWR5.1 IC11.OUT IC11.OUT@1 R87.2
5V_ALT6: APWR6.1 IC13.OUT IC13.OUT@1 R104.2
5V_ALT7: APWR7.1 IC15.OUT IC15.OUT@1 R121.2
5V_ALT8: APWR8.1 IC17.OUT IC17.OUT@1 R138.2
COILA+: IC1.P$21 JP3.4 JP5.4
COILA+1: IC4.P$21 JP18.4 JP21.4
COILA+2: IC6.P$21 JP32.4 JP35.4
COILA+3: IC8.P$21 JP46.4 JP49.4
COILA+4: IC10.P$21 JP60.4 JP63.4
COILA+5: IC12.P$21 JP74.4 JP77.4
COILA+6: IC14.P$21 JP88.4 JP91.4
COILA+7: IC16.P$21 JP102.4 JP105.4
COILA+8: IC18.P$21 JP116.4 JP119.4
COILA-: IC1.P$24 JP3.3 JP5.3
COILA-1: IC4.P$24 JP18.3 JP21.3
COILA-2: IC6.P$24 JP32.3 JP35.3
COILA-3: IC8.P$24 JP46.3 JP49.3
COILA-4: IC10.P$24 JP60.3 JP63.3
COILA-5: IC12.P$24 JP74.3 JP77.3
COILA-6: IC14.P$24 JP88.3 JP91.3
COILA-7: IC16.P$24 JP102.3 JP105.3
COILA-8: IC18.P$24 JP116.3 JP119.3
COILB+: IC1.P$1 JP3.1 JP5.1
COILB+1: IC4.P$1 JP18.1 JP21.1
COILB+2: IC6.P$1 JP32.1 JP35.1
COILB+3: IC8.P$1 JP46.1 JP49.1
COILB+4: IC10.P$1 JP60.1 JP63.1
COILB+5: IC12.P$1 JP74.1 JP77.1
COILB+6: IC14.P$1 JP88.1 JP91.1
COILB+7: IC16.P$1 JP102.1 JP105.1
COILB+8: IC18.P$1 JP116.1 JP119.1
COILB-: IC1.P$26 JP3.2 JP5.2
COILB-1: IC4.P$26 JP18.2 JP21.2
COILB-2: IC6.P$26 JP32.2 JP35.2
COILB-3: IC8.P$26 JP46.2 JP49.2
COILB-4: IC10.P$26 JP60.2 JP63.2
COILB-5: IC12.P$26 JP74.2 JP77.2
COILB-6: IC14.P$26 JP88.2 JP91.2
COILB-7: IC16.P$26 JP102.2 JP105.2
COILB-8: IC18.P$26 JP116.2 JP119.2
CUR_REF: IC1.P$17 R16.2 TP1.TP
CUR_REF1: IC4.P$17 R22.2 TP2.TP
CUR_REF2: IC6.P$17 R39.2 TP3.TP
CUR_REF3: IC8.P$17 R56.2 TP4.TP
CUR_REF4: IC10.P$17 R73.2 TP5.TP
CUR_REF5: IC12.P$17 R90.2 TP6.TP
CUR_REF6: IC14.P$17 R107.2 TP7.TP
CUR_REF7: IC16.P$17 R124.2 TP8.TP
CUR_REF8: IC18.P$17 R141.2 TP9.TP
DIR: IC1.P$19 JP12.4 JP14.4 R11.1
DIR1: IC4.P$19 JP24.4 JP26.4 R32.1
DIR2: IC6.P$19 JP38.4 JP40.4 R49.1
DIR3: IC8.P$19 JP52.4 JP54.4 R66.1
DIR4: IC10.P$19 JP66.4 JP68.4 R83.1
DIR5: IC12.P$19 JP80.4 JP82.4 R100.1
DIR6: IC14.P$19 JP94.4 JP96.4 R117.1
DIR7: IC16.P$19 JP108.4 JP110.4 R134.1
DIR8: IC18.P$19 JP122.4 JP124.4 R151.1
ENABLE: IC1.P$2 JP6.1 JP13.1 R10.1
ENABLE1: IC4.P$2 JP17.1 JP25.1 R31.1
ENABLE2: IC6.P$2 JP31.1 JP39.1 R48.1
ENABLE3: IC8.P$2 JP45.1 JP53.1 R65.1
ENABLE4: IC10.P$2 JP59.1 JP67.1 R82.1
ENABLE5: IC12.P$2 JP73.1 JP81.1 R99.1
ENABLE6: IC14.P$2 JP87.1 JP95.1 R116.1
ENABLE7: IC16.P$2 JP101.1 JP109.1 R133.1
ENABLE8: IC18.P$2 JP115.1 JP123.1 R150.1
GND: 3/5V.2 C1.2 C2.2 C7.2 C8.2 C9.2 C10.2 C14.- IC1.P$3 IC1.P$18 IC1.P$29 JP1.1 JP7.1 JP12.2 JP14.2 PWR_LED.C R7.1 R10.2 R16.3 R18.1 R19.1 R20.2
GND1: 3/5V1.2 C3.2 C5.2 C12.2 C13.2 C15.2 C17.- C18.2 IC4.P$3 IC4.P$18 IC4.P$29 JP19.1 JP22.1 JP24.2 JP26.2 PWR_LED1.C R21.1 R22.3 R23.1 R24.1 R25.2 R31.2
GND2: 3/5V2.2 C19.2 C21.2 C22.2 C23.2 C24.2 C26.- C27.2 IC6.P$3 IC6.P$18 IC6.P$29 JP33.1 JP36.1 JP38.2 JP40.2 PWR_LED2.C R38.1 R39.3 R40.1 R41.1 R42.2 R48.2
GND3: 3/5V3.2 C28.2 C30.2 C31.2 C32.2 C33.2 C35.- C36.2 IC8.P$3 IC8.P$18 IC8.P$29 JP47.1 JP50.1 JP52.2 JP54.2 PWR_LED3.C R55.1 R56.3 R57.1 R58.1 R59.2 R65.2
GND4: 3/5V4.2 C37.2 C39.2 C40.2 C41.2 C42.2 C44.- C45.2 IC10.P$3 IC10.P$18 IC10.P$29 JP61.1 JP64.1 JP66.2 JP68.2 PWR_LED4.C R72.1 R73.3 R74.1 R75.1 R76.2 R82.2
GND5: 3/5V5.2 C46.2 C48.2 C49.2 C50.2 C51.2 C53.- C54.2 IC12.P$3 IC12.P$18 IC12.P$29 JP75.1 JP78.1 JP80.2 JP82.2 PWR_LED5.C R89.1 R90.3 R91.1 R92.1 R93.2 R99.2
GND6: 3/5V6.2 C55.2 C57.2 C58.2 C59.2 C60.2 C62.- C63.2 IC14.P$3 IC14.P$18 IC14.P$29 JP89.1 JP92.1 JP94.2 JP96.2 PWR_LED6.C R106.1 R107.3 R108.1 R109.1 R110.2 R116.2
GND7: 3/5V7.2 C64.2 C66.2 C67.2 C68.2 C69.2 C71.- C72.2 IC16.P$3 IC16.P$18 IC16.P$29 JP103.1 JP106.1 JP108.2 JP110.2 PWR_LED7.C R123.1 R124.3 R125.1 R126.1 R127.2 R133.2
GND8: 3/5V8.2 C73.2 C75.2 C76.2 C77.2 C78.2 C80.- C81.2 IC18.P$3 IC18.P$18 IC18.P$29 JP117.1 JP120.1 JP122.2 JP124.2 PWR_LED8.C R140.1 R141.3 R142.1 R143.1 R144.2 R150.2
MS1: IC1.P$9 JP6.2 JP13.2 R1.1
MS2: IC1.P$10 JP10.1 JP11.1 R2.1
MS3: IC1.P$11 JP10.2 JP11.2 R3.1
MS4: IC4.P$9 JP17.2 JP25.2 R26.1
MS5: IC4.P$10 JP20.1 JP23.1 R27.1
MS6: IC4.P$11 JP20.2 JP23.2 R28.1
MS7: IC6.P$9 JP31.2 JP39.2 R43.1
MS8: IC6.P$10 JP34.1 JP37.1 R44.1
MS9: IC6.P$11 JP34.2 JP37.2 R45.1
MS10: IC8.P$9 JP45.2 JP53.2 R60.1
MS11: IC8.P$10 JP48.1 JP51.1 R61.1
MS12: IC8.P$11 JP48.2 JP51.2 R62.1
MS13: IC10.P$9 JP59.2 JP67.2 R77.1
MS14: IC10.P$10 JP62.1 JP65.1 R78.1
MS15: IC10.P$11 JP62.2 JP65.2 R79.1
MS16: IC12.P$9 JP73.2 JP81.2 R94.1
MS17: IC12.P$10 JP76.1 JP79.1 R95.1
MS18: IC12.P$11 JP76.2 JP79.2 R96.1
MS19: IC14.P$9 JP87.2 JP95.2 R111.1
MS20: IC14.P$10 JP90.1 JP93.1 R112.1
MS21: IC14.P$11 JP90.2 JP93.2 R113.1
MS22: IC16.P$9 JP101.2 JP109.2 R128.1
MS23: IC16.P$10 JP104.1 JP107.1 R129.1
MS24: IC16.P$11 JP104.2 JP107.2 R130.1
MS25: IC18.P$9 JP115.2 JP123.2 R145.1
MS26: IC18.P$10 JP118.1 JP121.1 R146.1
MS27: IC18.P$11 JP118.2 JP121.2 R147.1
N$1: D1.A JP1.2 JP7.2
N$2: PWR_LED.A R9.1
N$3: R13.2 R16.1
N$4: 3/5V.1 R6.1 R7.2
N$5: IC1.P$7 U$3.P$1
N$6: IC2.ADJ R6.2 R8.1
N$7: IC1.P$20 U$4.P$1
N$8: C6.1 IC1.P$4
N$9: C6.2 IC1.P$5
N$10: IC1.P$25 U$5.P$1
N$11: IC3.ADJ R14.2 R15.1
N$12: PWR_LED1.A R17.1
N$13: 3/5V1.1 R14.1 R21.2
N$14: IC4.P$27 R23.2
N$15: IC4.P$23 R24.2
N$16: C4.1 IC4.P$4
N$17: C4.2 IC4.P$5
N$18: IC4.P$13 R25.1
N$19: IC1.P$13 R20.1
N$20: C10.1 IC1.P$8
N$21: C11.1 IC1.P$6
N$22: C15.1 IC4.P$8
N$23: C16.1 IC4.P$6
N$24: D2.A JP19.2 JP22.2
N$25: R22.1 R34.2
N$26: IC4.P$7 U$8.P$1
N$27: IC4.P$20 U$9.P$1
N$28: IC4.P$25 U$10.P$1
N$29: IC5.ADJ R35.2 R36.1
N$30: PWR_LED2.A R37.1
N$31: IC1.P$27 R18.2
N$32: IC1.P$23 R19.2
N$33: 3/5V2.1 R35.1 R38.2
N$34: IC6.P$27 R40.2
N$35: IC6.P$23 R41.2
N$36: C20.1 IC6.P$4
N$37: C20.2 IC6.P$5
N$38: IC6.P$13 R42.1
N$39: C24.1 IC6.P$8
N$40: C25.1 IC6.P$6
N$41: D3.A JP33.2 JP36.2
N$42: R39.1 R51.2
N$43: IC6.P$7 U$13.P$1
N$44: IC6.P$20 U$14.P$1
N$45: IC6.P$25 U$15.P$1
N$46: IC7.ADJ R52.2 R53.1
N$47: PWR_LED3.A R54.1
N$48: 3/5V3.1 R52.1 R55.2
N$49: IC8.P$27 R57.2
N$50: IC8.P$23 R58.2
N$51: C29.1 IC8.P$4
N$52: C29.2 IC8.P$5
N$53: IC8.P$13 R59.1
N$54: C33.1 IC8.P$8
N$55: C34.1 IC8.P$6
N$56: D4.A JP47.2 JP50.2
N$57: R56.1 R68.2
N$58: IC8.P$7 U$18.P$1
N$59: IC8.P$20 U$19.P$1
N$60: IC8.P$25 U$20.P$1
N$61: IC9.ADJ R69.2 R70.1
N$62: PWR_LED4.A R71.1
N$63: 3/5V4.1 R69.1 R72.2
N$64: IC10.P$27 R74.2
N$65: IC10.P$23 R75.2
N$66: C38.1 IC10.P$4
N$67: C38.2 IC10.P$5
N$68: IC10.P$13 R76.1
N$69: C42.1 IC10.P$8
N$70: C43.1 IC10.P$6
N$71: D5.A JP61.2 JP64.2
N$72: R73.1 R85.2
N$73: IC10.P$7 U$23.P$1
N$74: IC10.P$20 U$24.P$1
N$75: IC10.P$25 U$25.P$1
N$76: IC11.ADJ R86.2 R87.1
N$77: PWR_LED5.A R88.1
N$78: 3/5V5.1 R86.1 R89.2
N$79: IC12.P$27 R91.2
N$80: IC12.P$23 R92.2
N$81: C47.1 IC12.P$4
N$82: C47.2 IC12.P$5
N$83: IC12.P$13 R93.1
N$84: C51.1 IC12.P$8
N$85: C52.1 IC12.P$6
N$86: D6.A JP75.2 JP78.2
N$87: R90.1 R102.2
N$88: IC12.P$7 U$28.P$1
N$89: IC12.P$20 U$29.P$1
N$90: IC12.P$25 U$30.P$1
N$91: IC13.ADJ R103.2 R104.1
N$92: PWR_LED6.A R105.1
N$93: 3/5V6.1 R103.1 R106.2
N$94: IC14.P$27 R108.2
N$95: IC14.P$23 R109.2
N$96: C56.1 IC14.P$4
N$97: C56.2 IC14.P$5
N$98: IC14.P$13 R110.1
N$99: C60.1 IC14.P$8
N$100: C61.1 IC14.P$6
N$101: D7.A JP89.2 JP92.2
N$102: R107.1 R119.2
N$103: IC14.P$7 U$33.P$1
N$104: IC14.P$20 U$34.P$1
N$105: IC14.P$25 U$35.P$1
N$106: IC15.ADJ R120.2 R121.1
N$107: PWR_LED7.A R122.1
N$108: 3/5V7.1 R120.1 R123.2
N$109: IC16.P$27 R125.2
N$110: IC16.P$23 R126.2
N$111: C65.1 IC16.P$4
N$112: C65.2 IC16.P$5
N$113: IC16.P$13 R127.1
N$114: C69.1 IC16.P$8
N$115: C70.1 IC16.P$6
N$116: D8.A JP103.2 JP106.2
N$117: R124.1 R136.2
N$118: IC16.P$7 U$38.P$1
N$119: IC16.P$20 U$39.P$1
N$120: IC16.P$25 U$40.P$1
N$121: IC17.ADJ R137.2 R138.1
N$122: PWR_LED8.A R139.1
N$123: 3/5V8.1 R137.1 R140.2
N$124: IC18.P$27 R142.2
N$125: IC18.P$23 R143.2
N$126: C74.1 IC18.P$4
N$127: C74.2 IC18.P$5
N$128: IC18.P$13 R144.1
N$129: C78.1 IC18.P$8
N$130: C79.1 IC18.P$6
N$131: D9.A JP117.2 JP120.2
N$132: R141.1 R153.2
N$133: IC18.P$7 U$43.P$1
N$134: IC18.P$20 U$44.P$1
N$135: IC18.P$25 U$45.P$1
RESET: IC1.P$12 JP10.3 JP11.3 R5.1
RESET1: IC4.P$12 JP20.3 JP23.3 R30.1
RESET2: IC6.P$12 JP34.3 JP37.3 R47.1
RESET3: IC8.P$12 JP48.3 JP51.3 R64.1
RESET4: IC10.P$12 JP62.3 JP65.3 R81.1
RESET5: IC12.P$12 JP76.3 JP79.3 R98.1
RESET6: IC14.P$12 JP90.3 JP93.3 R115.1
RESET7: IC16.P$12 JP104.3 JP107.3 R132.1
RESET8: IC18.P$12 JP118.3 JP121.3 R149.1
SLEEP: IC1.P$14 JP10.4 JP11.4 R4.1
SLEEP1: IC4.P$14 JP20.4 JP23.4 R29.1
SLEEP2: IC6.P$14 JP34.4 JP37.4 R46.1
SLEEP3: IC8.P$14 JP48.4 JP51.4 R63.1
SLEEP4: IC10.P$14 JP62.4 JP65.4 R80.1
SLEEP5: IC12.P$14 JP76.4 JP79.4 R97.1
SLEEP6: IC14.P$14 JP90.4 JP93.4 R114.1
SLEEP7: IC16.P$14 JP104.4 JP107.4 R131.1
SLEEP8: IC18.P$14 JP118.4 JP121.4 R148.1
STEP: IC1.P$16 JP12.3 JP14.3 R12.1
STEP1: IC4.P$16 JP24.3 JP26.3 R33.1
STEP2: IC6.P$16 JP38.3 JP40.3 R50.1
STEP3: IC8.P$16 JP52.3 JP54.3 R67.1
STEP4: IC10.P$16 JP66.3 JP68.3 R84.1
STEP5: IC12.P$16 JP80.3 JP82.3 R101.1
STEP6: IC14.P$16 JP94.3 JP96.3 R118.1
STEP7: IC16.P$16 JP108.3 JP110.3 R135.1
STEP8: IC18.P$16 JP122.3 JP124.3 R152.1
V+: C1.1 C8.1 C9.1 C11.2 C14.+ D1.C IC1.P$22 IC1.P$28 IC2.IN
V+1: C3.1 C12.1 C13.1 C16.2 C17.+ D2.C IC3.IN IC4.P$22 IC4.P$28
V+2: C19.1 C22.1 C23.1 C25.2 C26.+ D3.C IC5.IN IC6.P$22 IC6.P$28
V+3: C28.1 C31.1 C32.1 C34.2 C35.+ D4.C IC7.IN IC8.P$22 IC8.P$28
V+4: C37.1 C40.1 C41.1 C43.2 C44.+ D5.C IC9.IN IC10.P$22 IC10.P$28
V+5: C46.1 C49.1 C50.1 C52.2 C53.+ D6.C IC11.IN IC12.P$22 IC12.P$28
V+6: C55.1 C58.1 C59.1 C61.2 C62.+ D7.C IC13.IN IC14.P$22 IC14.P$28
V+7: C64.1 C67.1 C68.1 C70.2 C71.+ D8.C IC15.IN IC16.P$22 IC16.P$28
V+8: C73.1 C76.1 C77.1 C79.2 C80.+ D9.C IC17.IN IC18.P$22 IC18.P$28
VCC: APWR.2 C2.1 C7.1 IC1.P$15 JP12.1 JP14.1 R1.2 R2.2 R3.2 R4.2 R5.2 R9.2 R11.2 R12.2 R13.1
VCC1: APWR1.2 C5.1 C18.1 IC4.P$15 JP24.1 JP26.1 R17.2 R26.2 R27.2 R28.2 R29.2 R30.2 R32.2 R33.2 R34.1
VCC2: APWR2.2 C21.1 C27.1 IC6.P$15 JP38.1 JP40.1 R37.2 R43.2 R44.2 R45.2 R46.2 R47.2 R49.2 R50.2 R51.1
VCC3: APWR3.2 C30.1 C36.1 IC8.P$15 JP52.1 JP54.1 R54.2 R60.2 R61.2 R62.2 R63.2 R64.2 R66.2 R67.2 R68.1
VCC4: APWR4.2 C39.1 C45.1 IC10.P$15 JP66.1 JP68.1 R71.2 R77.2 R78.2 R79.2 R80.2 R81.2 R83.2 R84.2 R85.1
VCC5: APWR5.2 C48.1 C54.1 IC12.P$15 JP80.1 JP82.1 R88.2 R94.2 R95.2 R96.2 R97.2 R98.2 R100.2 R101.2 R102.1
VCC6: APWR6.2 C57.1 C63.1 IC14.P$15 JP94.1 JP96.1 R105.2 R111.2 R112.2 R113.2 R114.2 R115.2 R117.2 R118.2 R119.1
VCC7: APWR7.2 C66.1 C72.1 IC16.P$15 JP108.1 JP110.1 R122.2 R128.2 R129.2 R130.2 R131.2 R132.2 R134.2 R135.2 R136.1
VCC8: APWR8.2 C75.1 C81.1 IC18.P$15 JP122.1 JP124.1 R139.2 R145.2 R146.2 R147.2 R148.2 R149.2 R151.2 R152.2 R153.1

## Tracks (layer width: path | path; a pad name or v marks a point on that pad's centre or on a via)
5V_ALT  (via drill 0.38)
  Top 0.254: R8.2 7.22,26.05 6.6,26.67 IC2.OUT | v3.81,24.7 2.6,24.7 2.54,24.77
  Top 0.508: APWR.1 v4.57,21.72
  VCC 0.508: v4.57,21.72 4.57,23.94 v3.81,24.7
  pour Top: 7.62,30.48 0,30.48 0,24.13 7.62,24.13
5V_ALT1  (via drill 0.38)
  Top 0.254: R15.2 7.22,57.04 6.6,57.66 IC3.OUT | v3.81,55.69 2.6,55.69 2.54,55.75
  Top 0.508: APWR1.1 v4.57,52.7
  VCC 0.508: v4.57,52.7 4.57,54.93 v3.81,55.69
  pour Top: 7.62,61.47 0,61.47 0,55.12 7.62,55.12
5V_ALT2  (via drill 0.38)
  Top 0.254: R36.2 7.22,88.03 6.6,88.65 IC5.OUT | v3.81,86.68 2.6,86.68 2.54,86.74
  Top 0.508: APWR2.1 v4.57,83.69
  VCC 0.508: v4.57,83.69 4.57,85.92 v3.81,86.68
  pour Top: 7.62,92.46 0,92.46 0,86.11 7.62,86.11
5V_ALT3  (via drill 0.38)
  Top 0.254: R53.2 44.56,26.05 43.94,26.67 IC7.OUT | v41.15,24.7 39.94,24.7 39.88,24.77
  Top 0.508: APWR3.1 v41.91,21.72
  VCC 0.508: v41.91,21.72 41.91,23.94 v41.15,24.7
  pour Top: 44.96,30.48 37.34,30.48 37.34,24.13 44.96,24.13
5V_ALT4  (via drill 0.38)
  Top 0.254: R70.2 44.56,57.04 43.94,57.66 IC9.OUT | v41.15,55.69 39.94,55.69 39.88,55.75
  Top 0.508: APWR4.1 v41.91,52.7
  VCC 0.508: v41.91,52.7 41.91,54.93 v41.15,55.69
  pour Top: 44.96,61.47 37.34,61.47 37.34,55.12 44.96,55.12
5V_ALT5  (via drill 0.38)
  Top 0.254: R87.2 44.56,88.03 43.94,88.65 IC11.OUT | v41.15,86.68 39.94,86.68 39.88,86.74
  Top 0.508: APWR5.1 v41.91,83.69
  VCC 0.508: v41.91,83.69 41.91,85.92 v41.15,86.68
  pour Top: 44.96,92.46 37.34,92.46 37.34,86.11 44.96,86.11
5V_ALT6  (via drill 0.38)
  Top 0.254: R104.2 81.9,26.05 81.28,26.67 IC13.OUT | v78.49,24.7 77.28,24.7 77.22,24.77
  Top 0.508: APWR6.1 v79.25,21.72
  VCC 0.508: v79.25,21.72 79.25,23.94 v78.49,24.7
  pour Top: 82.3,30.48 74.68,30.48 74.68,24.13 82.3,24.13
5V_ALT7  (via drill 0.38)
  Top 0.254: R121.2 81.9,57.04 81.28,57.66 IC15.OUT | v78.49,55.69 77.28,55.69 77.22,55.75
  Top 0.508: APWR7.1 v79.25,52.7
  VCC 0.508: v79.25,52.7 79.25,54.93 v78.49,55.69
  pour Top: 82.3,61.47 74.68,61.47 74.68,55.12 82.3,55.12
5V_ALT8  (via drill 0.38)
  Top 0.254: R138.2 81.9,88.03 81.28,88.65 IC17.OUT | v78.49,86.68 77.28,86.68 77.22,86.74
  Top 0.508: APWR8.1 v79.25,83.69
  VCC 0.508: v79.25,83.69 79.25,85.92 v78.49,86.68
  pour Top: 82.3,92.46 74.68,92.46 74.68,86.11 82.3,86.11
COILA+  (via drill 0.38)
  other vias: 20,17.46
  pour Bottom (isolate 0.203, no thermals): 19.05,17.78 19.05,17.14 19.56,16.64 20.76,16.64 22.8,18.67 22.8,26.42 23.43,27.05 23.43,29.21 23.18,29.49 20.13,29.46 19.84,29.1 19.84,27.24 19.05,26.53 19.05,17.84 19.11,17.78
  pour Top (isolate 0.203, no thermals): 18.47,16.79 18.47,16.69 19.46,16.71 20.62,17.22 20.62,17.86 19.89,17.86
COILA+1  (via drill 0.38)
  other vias: 20,48.45
  pour Bottom (isolate 0.203, no thermals): 19.05,48.77 19.05,48.13 19.56,47.62 20.76,47.62 22.8,49.66 22.8,57.4 23.43,58.04 23.43,60.2 23.18,60.48 20.13,60.45 19.84,60.08 19.84,58.23 19.05,57.52 19.05,48.83 19.11,48.77
  pour Top (isolate 0.203, no thermals): 18.47,47.78 18.47,47.68 19.46,47.7 20.62,48.21 20.62,48.84 19.89,48.84
COILA+2  (via drill 0.38)
  other vias: 20,79.44
  pour Bottom (isolate 0.203, no thermals): 19.05,79.76 19.05,79.12 19.56,78.61 20.76,78.61 22.8,80.64 22.8,88.39 23.43,89.03 23.43,91.19 23.18,91.47 20.13,91.44 19.84,91.07 19.84,89.22 19.05,88.51 19.05,79.82 19.11,79.76
  pour Top (isolate 0.203, no thermals): 18.47,78.77 18.47,78.66 19.46,78.69 20.62,79.2 20.62,79.83 19.89,79.83
COILA+3  (via drill 0.38)
  other vias: 57.34,17.46
  pour Bottom (isolate 0.203, no thermals): 56.39,17.78 56.39,17.14 56.9,16.64 58.1,16.64 60.13,18.67 60.13,26.42 60.77,27.05 60.77,29.21 60.52,29.49 57.47,29.46 57.18,29.1 57.18,27.24 56.39,26.53 56.39,17.84 56.45,17.78
  pour Top (isolate 0.203, no thermals): 55.8,16.79 55.8,16.69 56.79,16.71 57.96,17.22 57.96,17.86 57.23,17.86
COILA+4  (via drill 0.38)
  other vias: 57.34,48.45
  pour Bottom (isolate 0.203, no thermals): 56.39,48.77 56.39,48.13 56.9,47.62 58.1,47.62 60.13,49.66 60.13,57.4 60.77,58.04 60.77,60.2 60.52,60.48 57.47,60.45 57.18,60.08 57.18,58.23 56.39,57.52 56.39,48.83 56.45,48.77
  pour Top (isolate 0.203, no thermals): 55.8,47.78 55.8,47.68 56.79,47.7 57.96,48.21 57.96,48.84 57.23,48.84
COILA+5  (via drill 0.38)
  other vias: 57.34,79.44
  pour Bottom (isolate 0.203, no thermals): 56.39,79.76 56.39,79.12 56.9,78.61 58.1,78.61 60.13,80.64 60.13,88.39 60.77,89.03 60.77,91.19 60.52,91.47 57.47,91.44 57.18,91.07 57.18,89.22 56.39,88.51 56.39,79.82 56.45,79.76
  pour Top (isolate 0.203, no thermals): 55.8,78.77 55.8,78.66 56.79,78.69 57.96,79.2 57.96,79.83 57.23,79.83
COILA+6  (via drill 0.38)
  other vias: 94.68,17.46
  pour Bottom (isolate 0.203, no thermals): 93.73,17.78 93.73,17.14 94.23,16.64 95.44,16.64 97.47,18.67 97.47,26.42 98.11,27.05 98.11,29.21 97.85,29.49 94.81,29.46 94.51,29.1 94.51,27.24 93.73,26.53 93.73,17.84 93.79,17.78
  pour Top (isolate 0.203, no thermals): 93.14,16.79 93.14,16.69 94.13,16.71 95.3,17.22 95.3,17.86 94.56,17.86
COILA+7  (via drill 0.38)
  other vias: 94.68,48.45
  pour Bottom (isolate 0.203, no thermals): 93.73,48.77 93.73,48.13 94.23,47.62 95.44,47.62 97.47,49.66 97.47,57.4 98.11,58.04 98.11,60.2 97.85,60.48 94.81,60.45 94.51,60.08 94.51,58.23 93.73,57.52 93.73,48.83 93.79,48.77
  pour Top (isolate 0.203, no thermals): 93.14,47.78 93.14,47.68 94.13,47.7 95.3,48.21 95.3,48.84 94.56,48.84
COILA+8  (via drill 0.38)
  other vias: 94.68,79.44
  pour Bottom (isolate 0.203, no thermals): 93.73,79.76 93.73,79.12 94.23,78.61 95.44,78.61 97.47,80.64 97.47,88.39 98.11,89.03 98.11,91.19 97.85,91.47 94.81,91.44 94.51,91.07 94.51,89.22 93.73,88.51 93.73,79.82 93.79,79.76
  pour Top (isolate 0.203, no thermals): 93.14,78.77 93.14,78.66 94.13,78.69 95.3,79.2 95.3,79.83 94.56,79.83
COILA-
  Top 0.254: 17.02,17.64 IC1.P$24 17.02,20.45 17.27,24.77 JP3.3
  pour Top (isolate 0.203, no thermals): 16.94,29.48 19.81,29.48 19.81,27.97 18.92,26.54 18.92,24.26 17.4,23.11 17.4,20.24 17.04,18.34 17.04,18.21 16.97,18.21 16.97,18.34 16.76,18.59 16.74,29.24
COILA-1
  Top 0.254: 17.02,48.63 IC4.P$24 17.02,51.44 17.27,55.75 JP18.3
  pour Top (isolate 0.203, no thermals): 16.94,60.46 19.81,60.46 19.81,58.95 18.92,57.53 18.92,55.24 17.4,54.1 17.4,51.23 17.04,49.33 17.04,49.2 16.97,49.2 16.97,49.33 16.76,49.58 16.74,60.22
COILA-2
  Top 0.254: 17.02,79.62 IC6.P$24 17.02,82.42 17.27,86.74 JP32.3
  pour Top (isolate 0.203, no thermals): 16.94,91.45 19.81,91.45 19.81,89.94 18.92,88.52 18.92,86.23 17.4,85.09 17.4,82.22 17.04,80.31 17.04,80.19 16.97,80.19 16.97,80.31 16.76,80.57 16.74,91.21
COILA-3
  Top 0.254: 54.36,17.64 IC8.P$24 54.36,20.45 54.61,24.77 JP46.3
  pour Top (isolate 0.203, no thermals): 54.28,29.48 57.15,29.48 57.15,27.97 56.26,26.54 56.26,24.26 54.74,23.11 54.74,20.24 54.38,18.34 54.38,18.21 54.31,18.21 54.31,18.34 54.1,18.59 54.08,29.24
COILA-4
  Top 0.254: 54.36,48.63 IC10.P$24 54.36,51.44 54.61,55.75 JP60.3
  pour Top (isolate 0.203, no thermals): 54.28,60.46 57.15,60.46 57.15,58.95 56.26,57.53 56.26,55.24 54.74,54.1 54.74,51.23 54.38,49.33 54.38,49.2 54.31,49.2 54.31,49.33 54.1,49.58 54.08,60.22
COILA-5
  Top 0.254: 54.36,79.62 IC12.P$24 54.36,82.42 54.61,86.74 JP74.3
  pour Top (isolate 0.203, no thermals): 54.28,91.45 57.15,91.45 57.15,89.94 56.26,88.52 56.26,86.23 54.74,85.09 54.74,82.22 54.38,80.31 54.38,80.19 54.31,80.19 54.31,80.31 54.1,80.57 54.08,91.21
COILA-6
  Top 0.254: 91.69,17.64 IC14.P$24 91.69,20.45 91.95,24.77 JP88.3
  pour Top (isolate 0.203, no thermals): 91.62,29.48 94.49,29.48 94.49,27.97 93.6,26.54 93.6,24.26 92.08,23.11 92.08,20.24 91.72,18.34 91.72,18.21 91.64,18.21 91.64,18.34 91.44,18.59 91.41,29.24
COILA-7
  Top 0.254: 91.69,48.63 IC16.P$24 91.69,51.44 91.95,55.75 JP102.3
  pour Top (isolate 0.203, no thermals): 91.62,60.46 94.49,60.46 94.49,58.95 93.6,57.53 93.6,55.24 92.08,54.1 92.08,51.23 91.72,49.33 91.72,49.2 91.64,49.2 91.64,49.33 91.44,49.58 91.41,60.22
COILA-8
  Top 0.254: 91.69,79.62 IC18.P$24 91.69,82.42 91.95,86.74 JP116.3
  pour Top (isolate 0.203, no thermals): 91.62,91.45 94.49,91.45 94.49,89.94 93.6,88.52 93.6,86.23 92.08,85.09 92.08,82.22 91.72,80.31 91.72,80.19 91.64,80.19 91.64,80.31 91.44,80.57 91.41,91.21
COILB+  (via drill 0.38)
  other vias: 13.02,17.46
  pour Top (isolate 0.203, no thermals): 12.42,17.86 12.42,17.25 12.94,16.7 14.57,16.7 14.57,16.83 13.21,17.86
  pour Bottom (isolate 0.203, no thermals): 9.59,29.35 9.59,23.18 11.56,21.21 11.56,18.1 13.08,16.57 13.46,16.57 13.91,17.02 13.91,17.53 13.21,18.22 13.21,18.99 13.97,19.75 13.97,26.63 13.27,27.33 13.27,28.99 12.74,29.53 9.8,29.54
COILB+1  (via drill 0.38)
  other vias: 13.02,48.45
  pour Top (isolate 0.203, no thermals): 12.42,48.84 12.42,48.23 12.94,47.69 14.57,47.69 14.57,47.82 13.21,48.84
  pour Bottom (isolate 0.203, no thermals): 9.59,60.34 9.59,54.17 11.56,52.2 11.56,49.09 13.08,47.56 13.46,47.56 13.91,48.01 13.91,48.51 13.21,49.21 13.21,49.97 13.97,50.74 13.97,57.62 13.27,58.32 13.27,59.98 12.74,60.52 9.8,60.53
COILB+2  (via drill 0.38)
  other vias: 13.02,79.44
  pour Top (isolate 0.203, no thermals): 12.42,79.83 12.42,79.22 12.94,78.68 14.57,78.68 14.57,78.8 13.21,79.83
  pour Bottom (isolate 0.203, no thermals): 9.59,91.33 9.59,85.15 11.56,83.19 11.56,80.07 13.08,78.55 13.46,78.55 13.91,78.99 13.91,79.5 13.21,80.2 13.21,80.96 13.97,81.72 13.97,88.61 13.27,89.31 13.27,90.97 12.74,91.5 9.8,91.52
COILB+3  (via drill 0.38)
  other vias: 50.36,17.46
  pour Top (isolate 0.203, no thermals): 49.76,17.86 49.76,17.25 50.28,16.7 51.9,16.7 51.9,16.83 50.55,17.86
  pour Bottom (isolate 0.203, no thermals): 46.93,29.35 46.93,23.18 48.9,21.21 48.9,18.1 50.42,16.57 50.8,16.57 51.24,17.02 51.24,17.53 50.55,18.22 50.55,18.99 51.31,19.75 51.31,26.63 50.61,27.33 50.61,28.99 50.08,29.53 47.14,29.54
COILB+4  (via drill 0.38)
  other vias: 50.36,48.45
  pour Top (isolate 0.203, no thermals): 49.76,48.84 49.76,48.23 50.28,47.69 51.9,47.69 51.9,47.82 50.55,48.84
  pour Bottom (isolate 0.203, no thermals): 46.93,60.34 46.93,54.17 48.9,52.2 48.9,49.09 50.42,47.56 50.8,47.56 51.24,48.01 51.24,48.51 50.55,49.21 50.55,49.97 51.31,50.74 51.31,57.62 50.61,58.32 50.61,59.98 50.08,60.52 47.14,60.53
COILB+5  (via drill 0.38)
  other vias: 50.36,79.44
  pour Top (isolate 0.203, no thermals): 49.76,79.83 49.76,79.22 50.28,78.68 51.9,78.68 51.9,78.8 50.55,79.83
  pour Bottom (isolate 0.203, no thermals): 46.93,91.33 46.93,85.15 48.9,83.19 48.9,80.07 50.42,78.55 50.8,78.55 51.24,78.99 51.24,79.5 50.55,80.2 50.55,80.96 51.31,81.72 51.31,88.61 50.61,89.31 50.61,90.97 50.08,91.5 47.14,91.52
COILB+6  (via drill 0.38)
  other vias: 87.69,17.46
  pour Top (isolate 0.203, no thermals): 87.1,17.86 87.1,17.25 87.62,16.7 89.24,16.7 89.24,16.83 87.88,17.86
  pour Bottom (isolate 0.203, no thermals): 84.26,29.35 84.26,23.18 86.23,21.21 86.23,18.1 87.76,16.57 88.14,16.57 88.58,17.02 88.58,17.53 87.88,18.22 87.88,18.99 88.65,19.75 88.65,26.63 87.95,27.33 87.95,28.99 87.41,29.53 84.48,29.54
COILB+7  (via drill 0.38)
  other vias: 87.69,48.45
  pour Top (isolate 0.203, no thermals): 87.1,48.84 87.1,48.23 87.62,47.69 89.24,47.69 89.24,47.82 87.88,48.84
  pour Bottom (isolate 0.203, no thermals): 84.26,60.34 84.26,54.17 86.23,52.2 86.23,49.09 87.76,47.56 88.14,47.56 88.58,48.01 88.58,48.51 87.88,49.21 87.88,49.97 88.65,50.74 88.65,57.62 87.95,58.32 87.95,59.98 87.41,60.52 84.48,60.53
COILB+8  (via drill 0.38)
  other vias: 87.69,79.44
  pour Top (isolate 0.203, no thermals): 87.1,79.83 87.1,79.22 87.62,78.68 89.24,78.68 89.24,78.8 87.88,79.83
  pour Bottom (isolate 0.203, no thermals): 84.26,91.33 84.26,85.15 86.23,83.19 86.23,80.07 87.76,78.55 88.14,78.55 88.58,78.99 88.58,79.5 87.88,80.2 87.88,80.96 88.65,81.72 88.65,88.61 87.95,89.31 87.95,90.97 87.41,91.5 84.48,91.52
COILB-
  Top 0.254: 16,17.64 IC1.P$26 16,19.68 16,23.88 JP3.2
  pour Top (isolate 0.203, no thermals): 16.1,29.46 13.21,29.46 13.21,27.94 14.1,26.54 14.1,24.26 15.62,23.11 15.62,20.27 15.98,18.39 15.98,18.19 16.05,18.19 16.05,18.34 16.26,18.59 16.28,29.24
COILB-1
  Top 0.254: 16,48.63 IC4.P$26 16,50.67 16,54.86 JP18.2
  pour Top (isolate 0.203, no thermals): 16.1,60.45 13.21,60.45 13.21,58.93 14.1,57.53 14.1,55.24 15.62,54.1 15.62,51.26 15.98,49.38 15.98,49.17 16.05,49.17 16.05,49.33 16.26,49.58 16.28,60.22
COILB-2
  Top 0.254: 16,79.62 IC6.P$26 16,81.66 16,85.85 JP32.2
  pour Top (isolate 0.203, no thermals): 16.1,91.44 13.21,91.44 13.21,89.92 14.1,88.52 14.1,86.23 15.62,85.09 15.62,82.25 15.98,80.37 15.98,80.16 16.05,80.16 16.05,80.31 16.26,80.57 16.28,91.21
COILB-3
  Top 0.254: 53.34,17.64 IC8.P$26 53.34,19.68 53.34,23.88 JP46.2
  pour Top (isolate 0.203, no thermals): 53.44,29.46 50.55,29.46 50.55,27.94 51.44,26.54 51.44,24.26 52.96,23.11 52.96,20.27 53.31,18.39 53.31,18.19 53.39,18.19 53.39,18.34 53.59,18.59 53.62,29.24
COILB-4
  Top 0.254: 53.34,48.63 IC10.P$26 53.34,50.67 53.34,54.86 JP60.2
  pour Top (isolate 0.203, no thermals): 53.44,60.45 50.55,60.45 50.55,58.93 51.44,57.53 51.44,55.24 52.96,54.1 52.96,51.26 53.31,49.38 53.31,49.17 53.39,49.17 53.39,49.33 53.59,49.58 53.62,60.22
COILB-5
  Top 0.254: 53.34,79.62 IC12.P$26 53.34,81.66 53.34,85.85 JP74.2
  pour Top (isolate 0.203, no thermals): 53.44,91.44 50.55,91.44 50.55,89.92 51.44,88.52 51.44,86.23 52.96,85.09 52.96,82.25 53.31,80.37 53.31,80.16 53.39,80.16 53.39,80.31 53.59,80.57 53.62,91.21
COILB-6
  Top 0.254: 90.68,17.64 IC14.P$26 90.68,19.68 90.68,23.88 JP88.2
  pour Top (isolate 0.203, no thermals): 90.78,29.46 87.88,29.46 87.88,27.94 88.77,26.54 88.77,24.26 90.3,23.11 90.3,20.27 90.65,18.39 90.65,18.19 90.73,18.19 90.73,18.34 90.93,18.59 90.96,29.24
COILB-7
  Top 0.254: 90.68,48.63 IC16.P$26 90.68,50.67 90.68,54.86 JP102.2
  pour Top (isolate 0.203, no thermals): 90.78,60.45 87.88,60.45 87.88,58.93 88.77,57.53 88.77,55.24 90.3,54.1 90.3,51.26 90.65,49.38 90.65,49.17 90.73,49.17 90.73,49.33 90.93,49.58 90.96,60.22
COILB-8